# EAGLE board SB v1.1 - panel (EAGLE 6.5.0), part 1 of 2
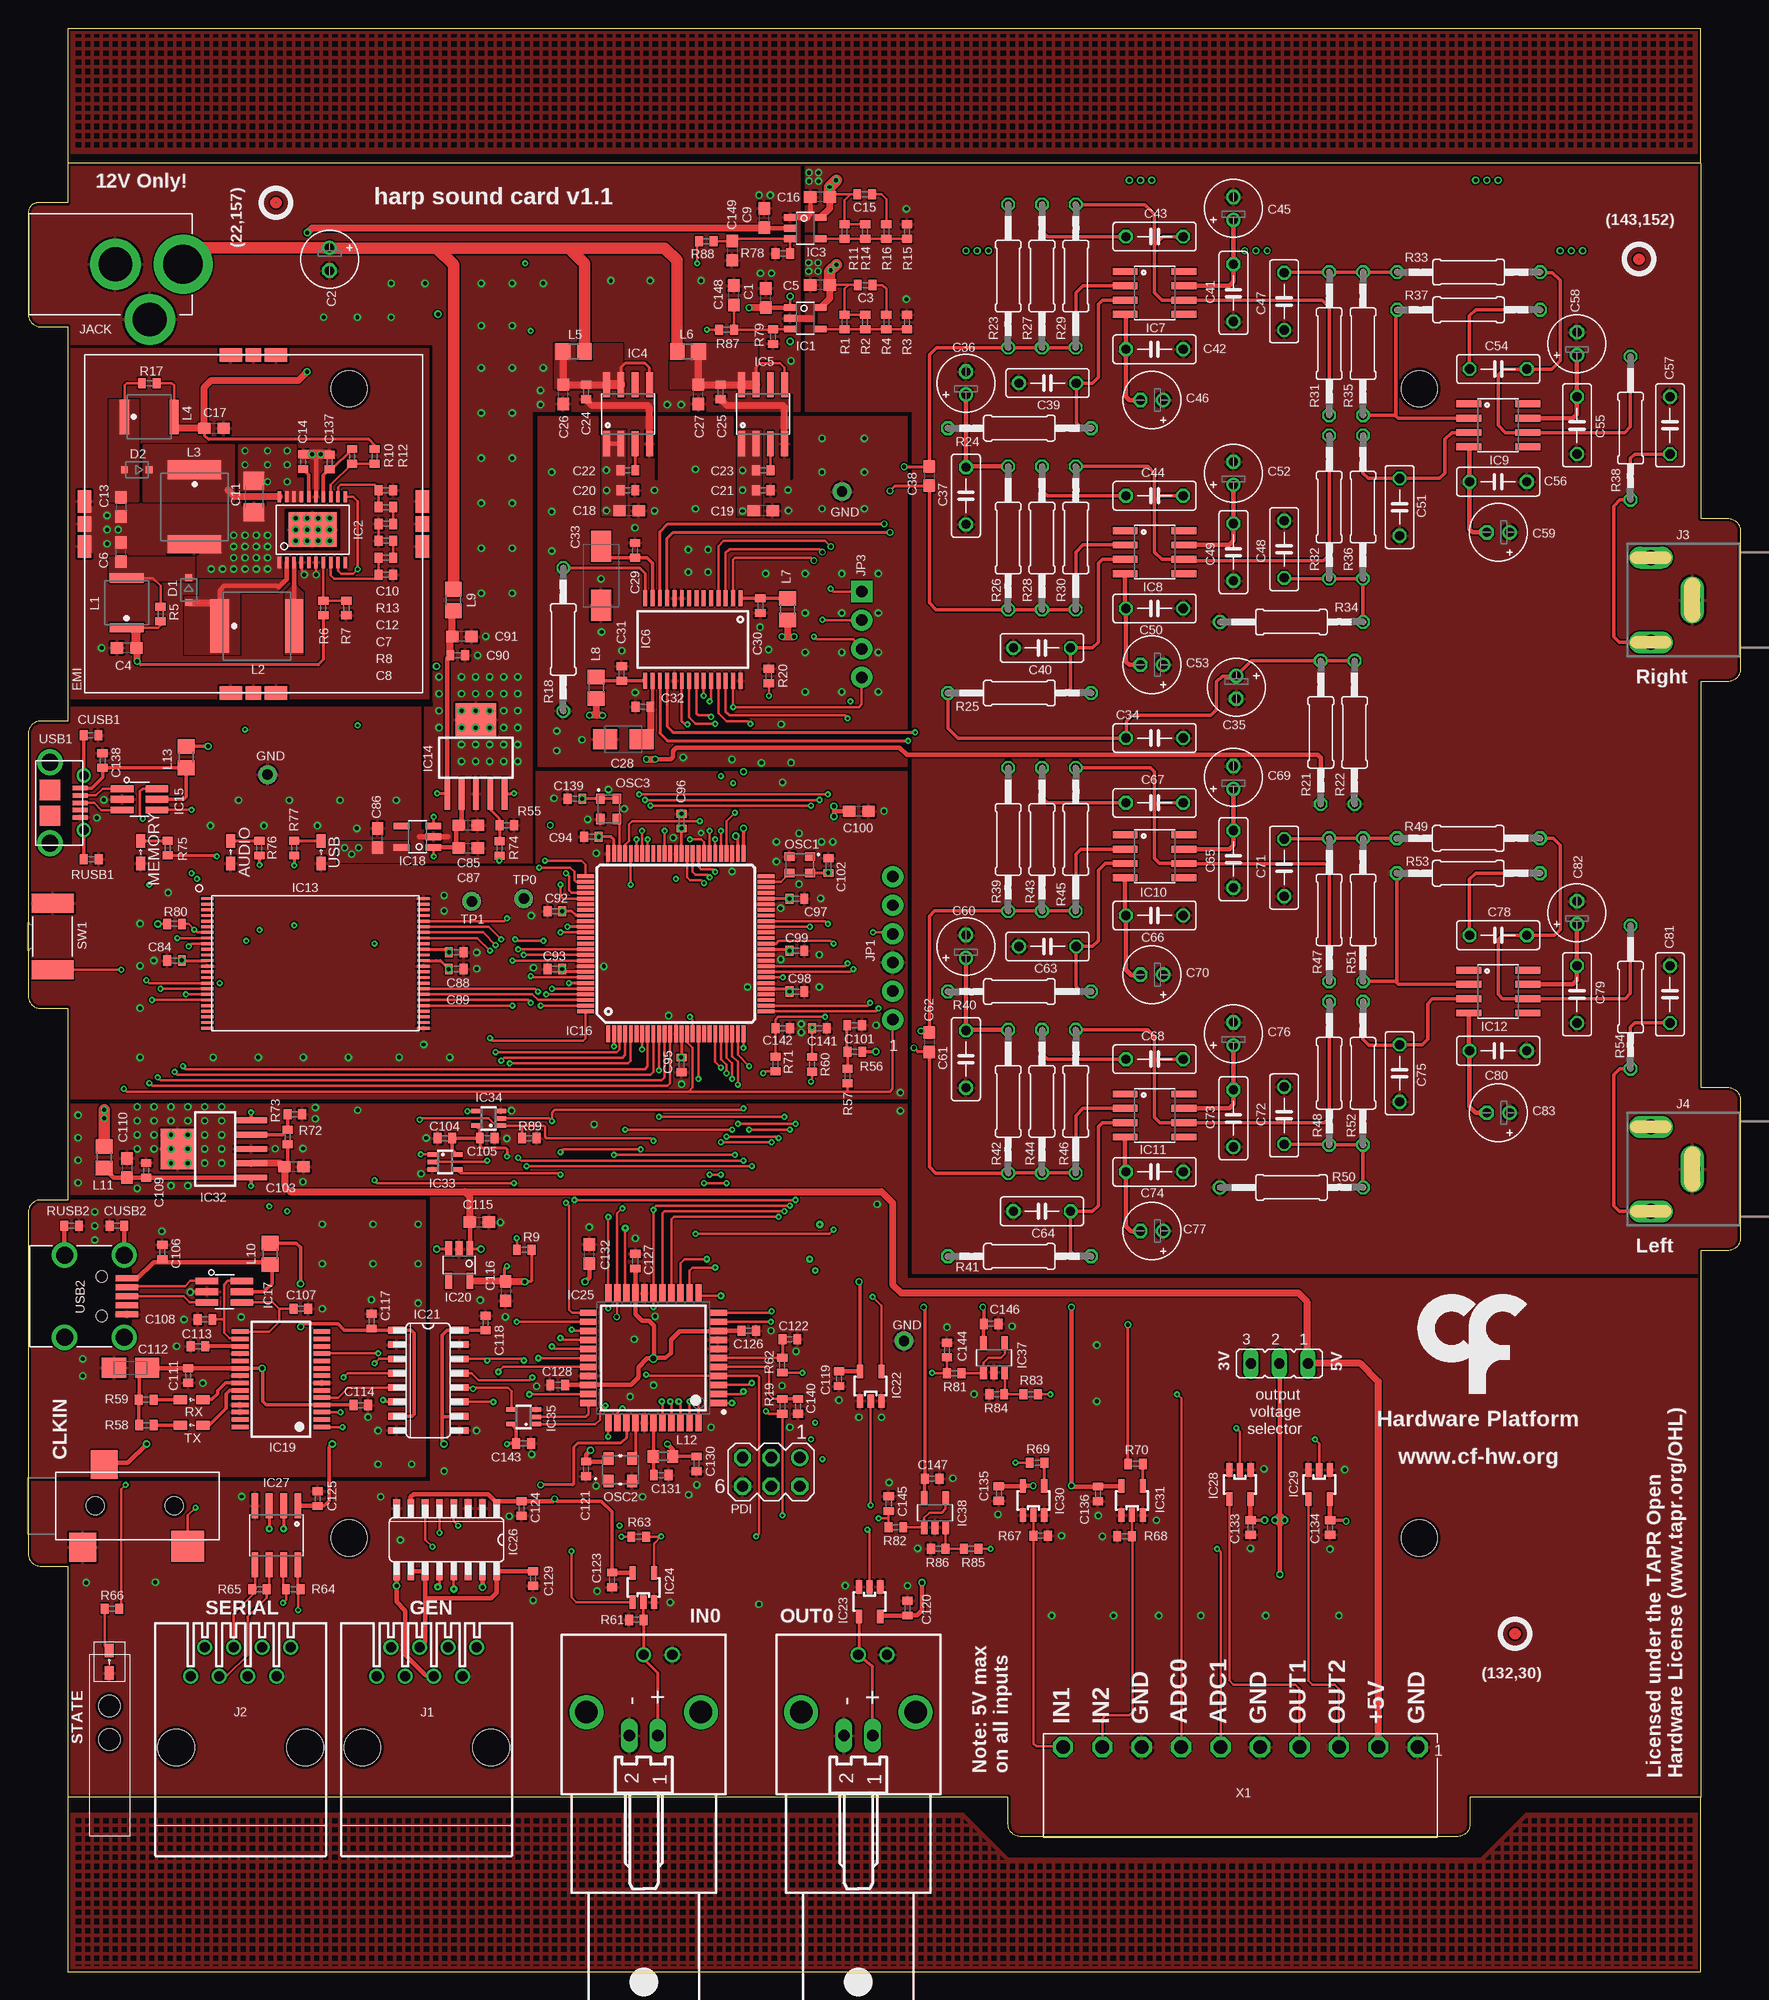
[diagram p0: board, top side]
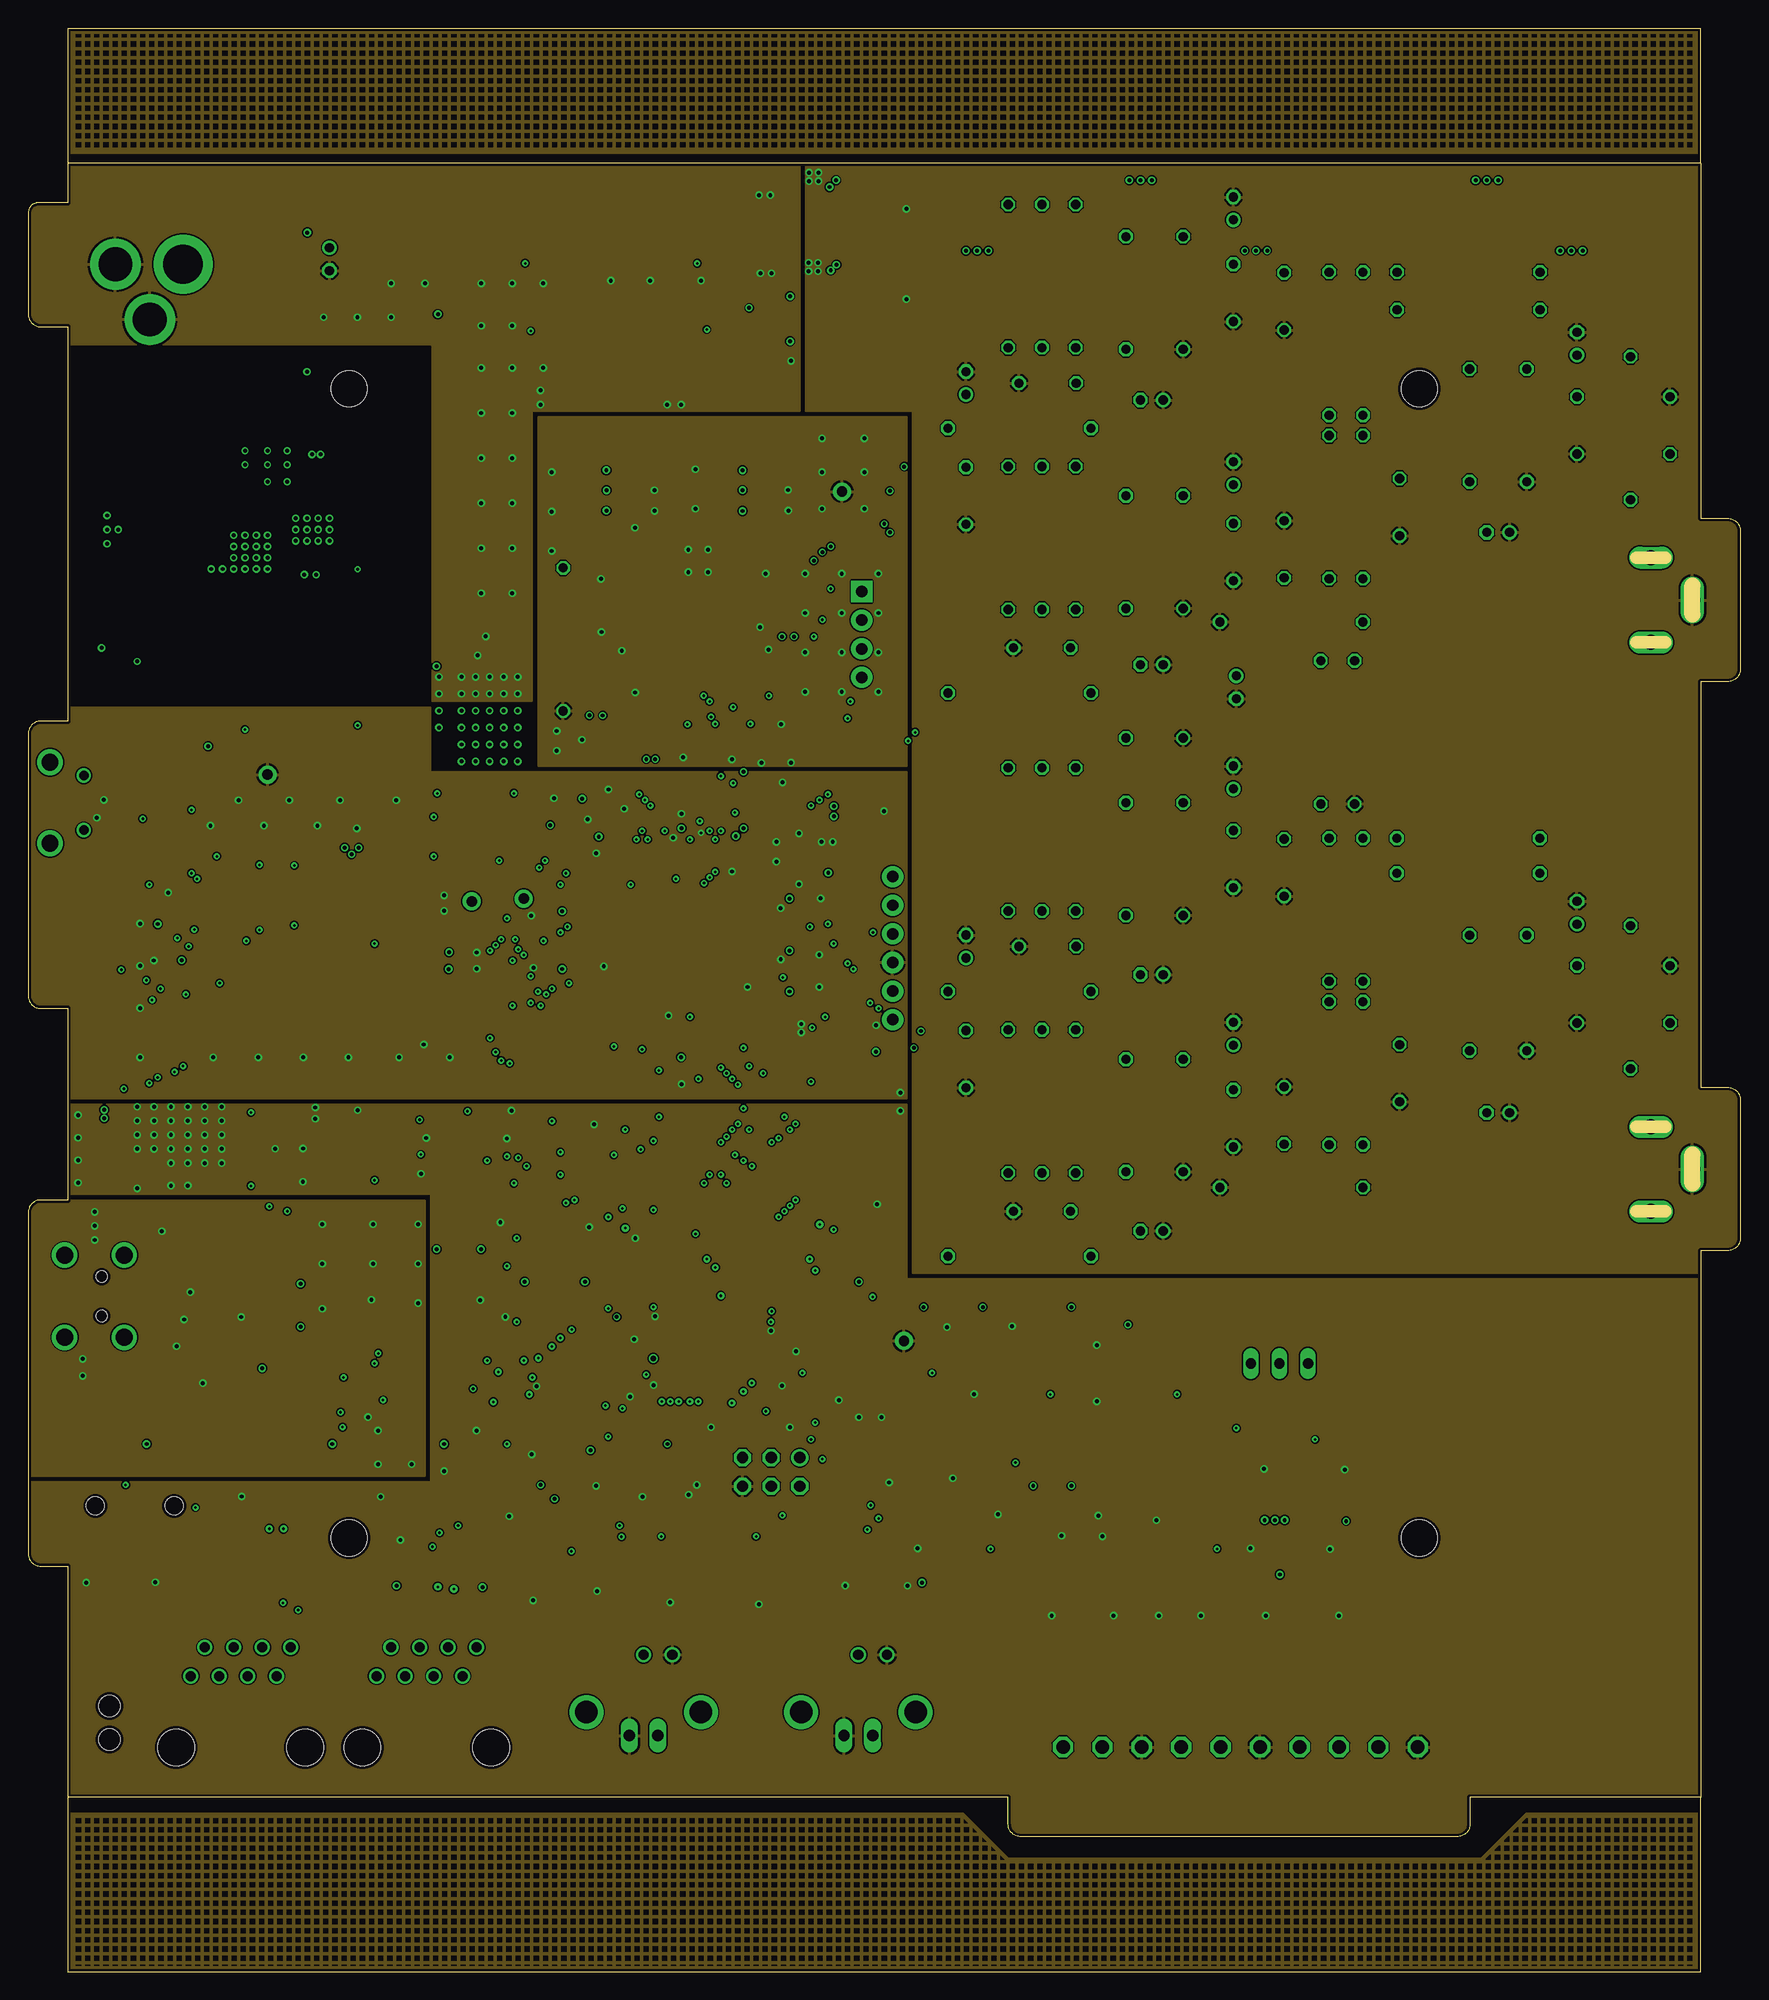
[diagram p1: board, inner layer Route2]
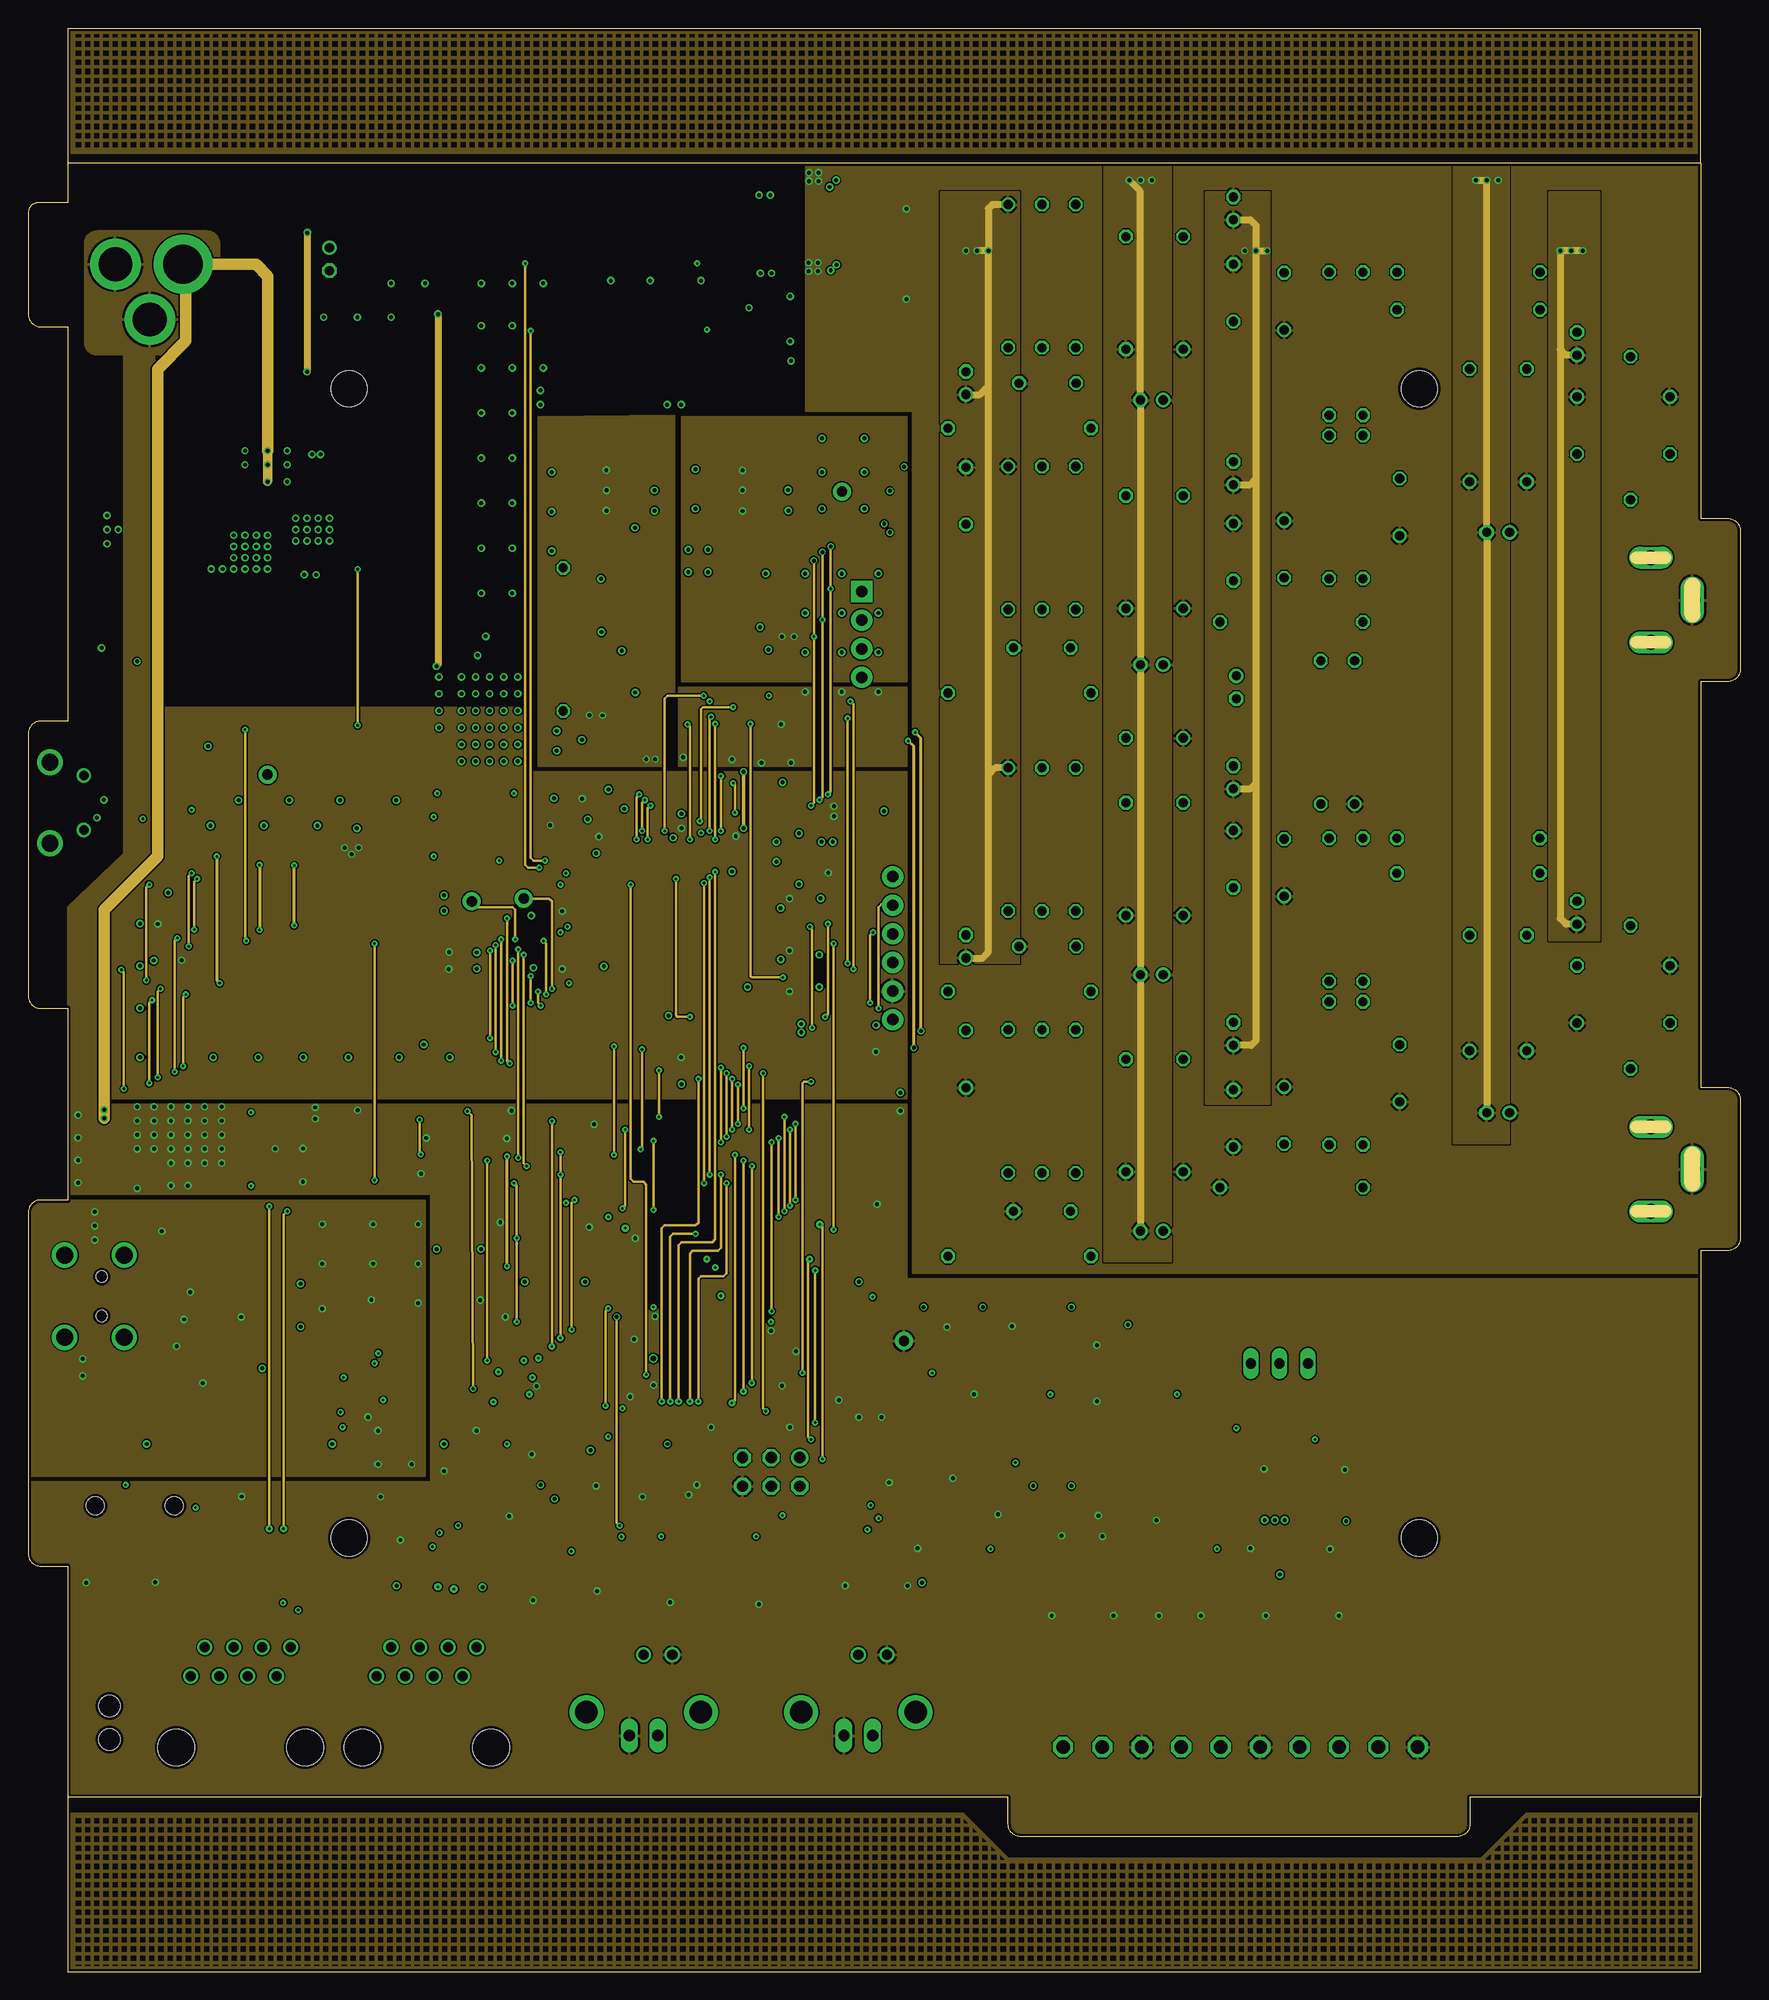
[diagram p2: board, inner layer Route3]
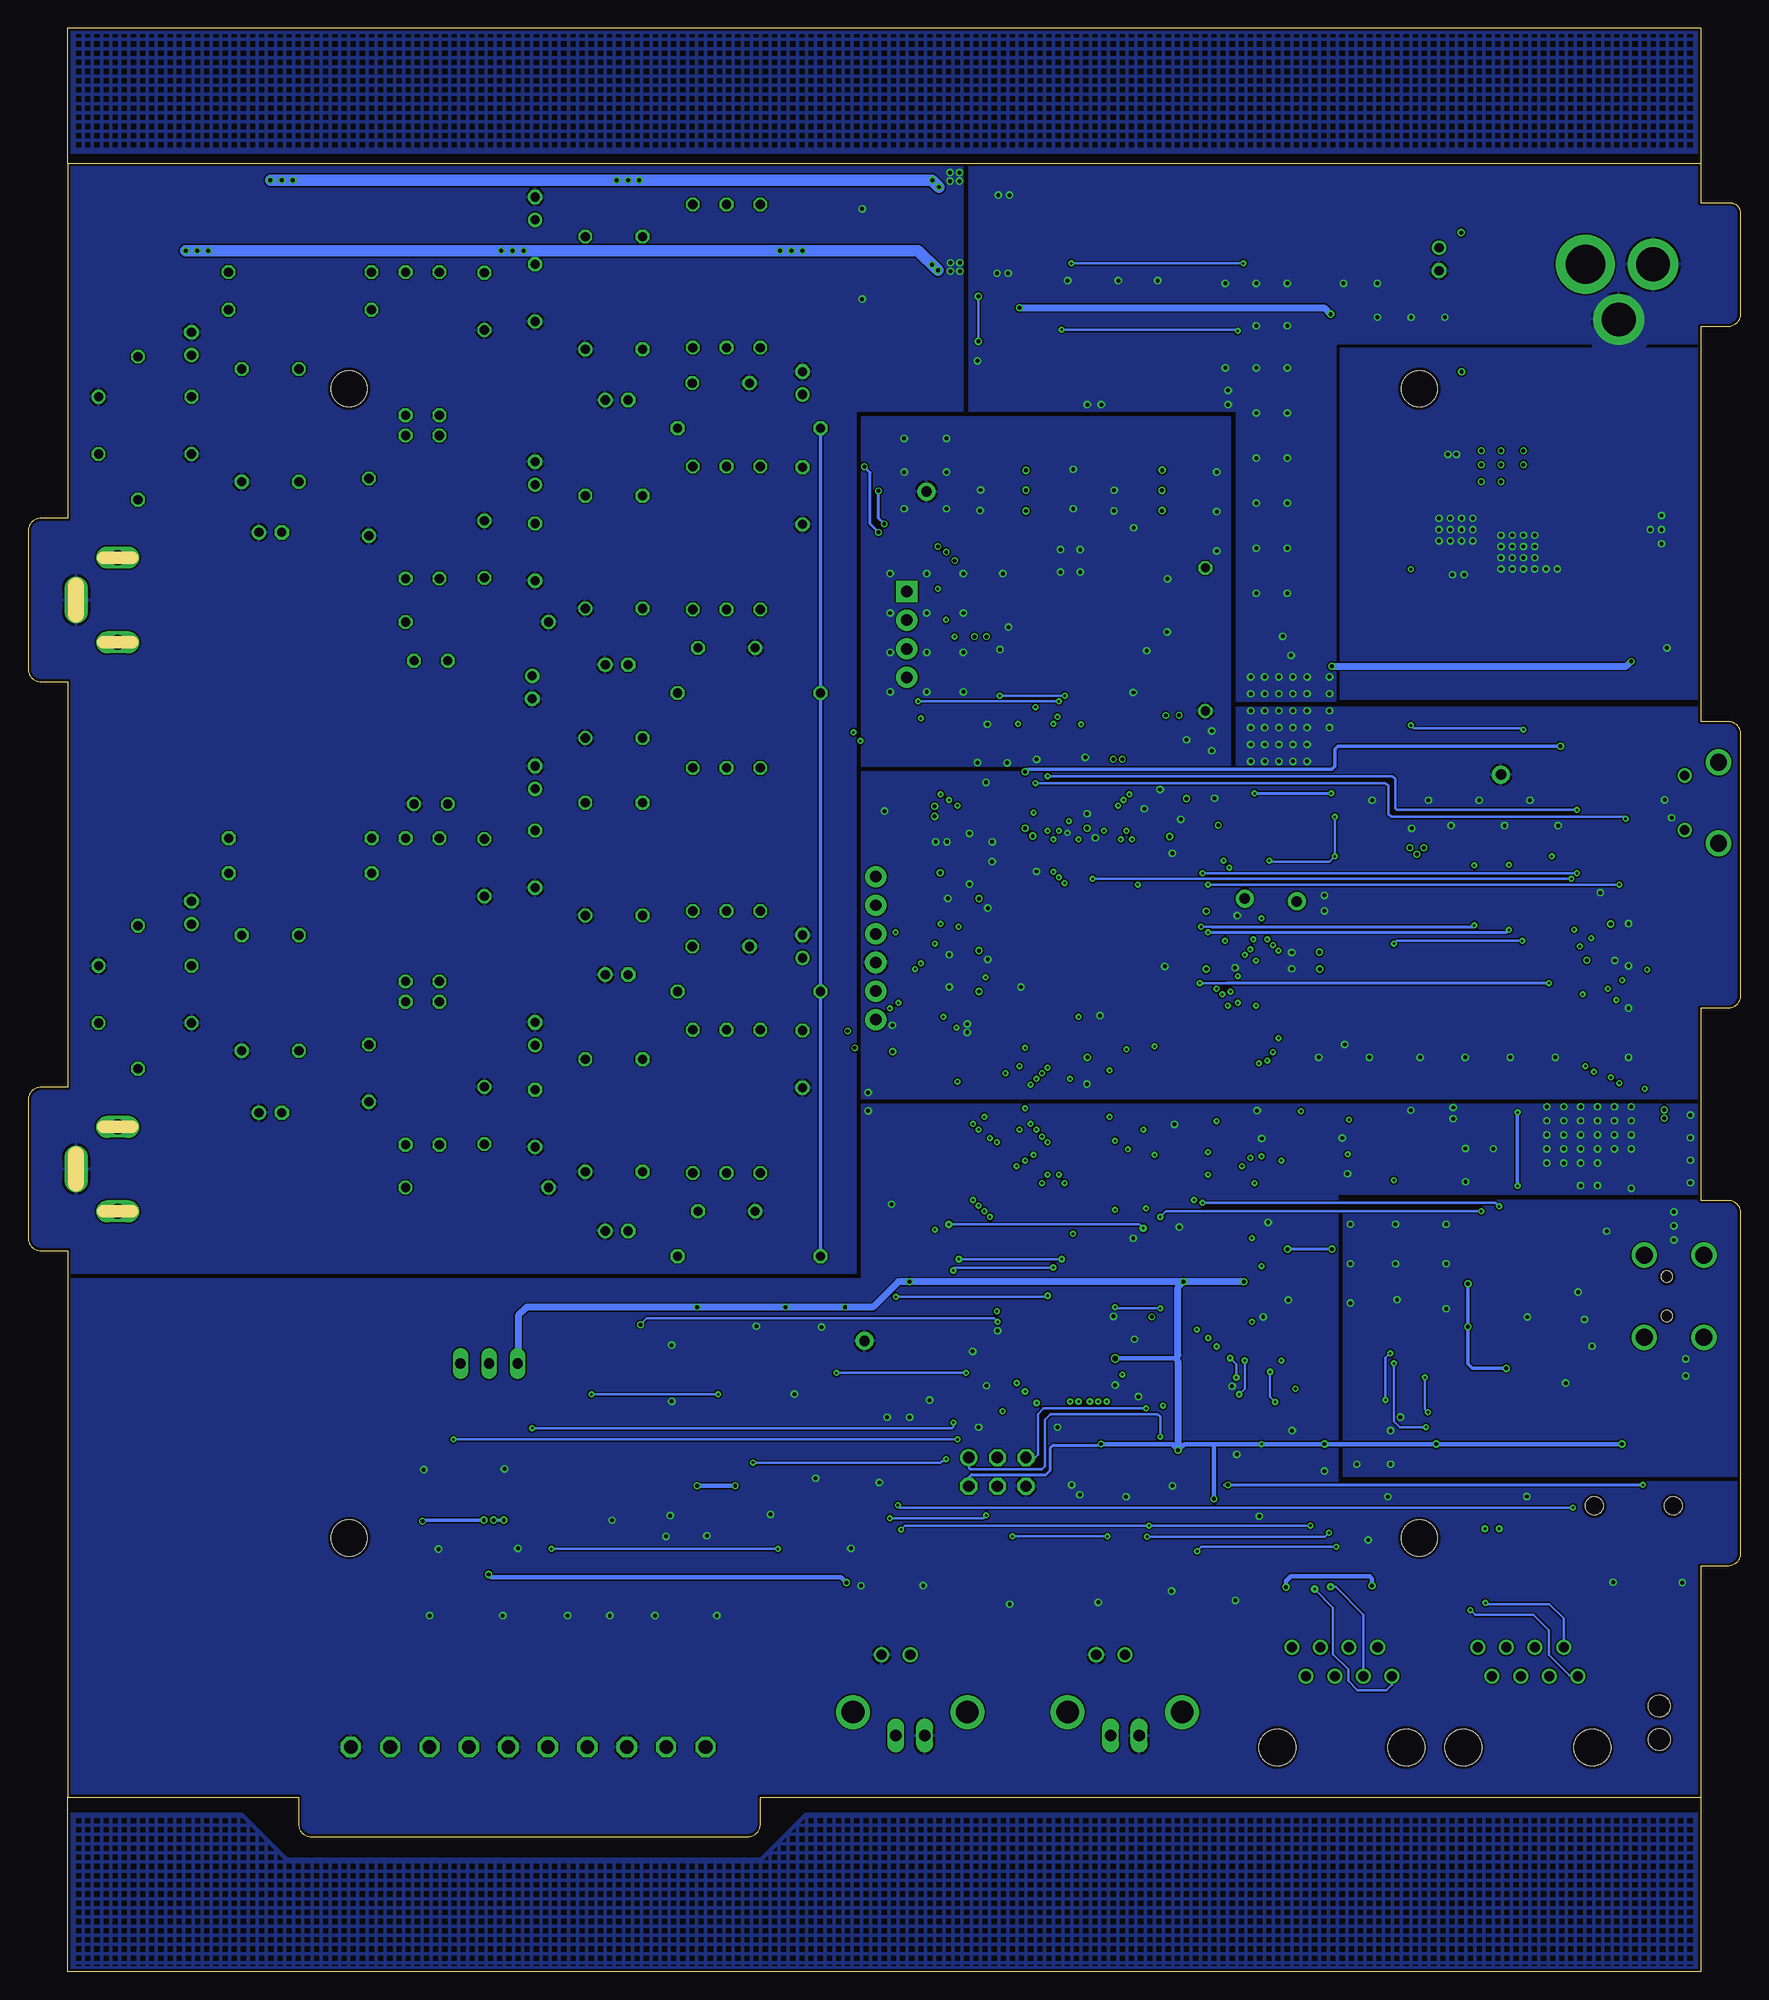
[diagram p3: board, bottom side, seen from below]

Size 152 x 172.5 mm. Coordinates in mm from the lower left corner, seen from the top.
Outline: 3.5,15.5 3.5,36 1.12,36 arc-90 0,37.12 0,67.38 arc-90 1.12,68.5 3.5,68.5 3.5,85.5 1.12,85.5 arc-90 0,86.62 0,109.88 arc-90 1.12,111 3.5,111 3.5,146 1.12,146 arc-90 0,147.12 0,156.1 arc-90 0.9,157 3.5,157 3.5,160.5
Outline: 148.5,160.5 148.5,129 150.88,129 arc-90 152,127.88 152,115.62 arc-90 150.88,114.5 148.5,114.5 148.5,78.5 150.88,78.5 arc-90 152,77.38 152,65.12 arc-90 150.88,64 148.5,64 148.5,15.5
Outline: 148.5,15.5 128,15.5 128,13.12 arc-90 126.88,12 88.12,12 arc-90 87,13.12 87,15.5 3.5,15.5
Outline: 148.5,160.5 3.5,160.5
Outline: 3.5,15.5 3.5,0 148.5,0 148.5,15.5
Outline: 3.5,160.5 3.5,172.5 148.5,172.5 148.5,160.5
Copper layers (1+2*3+16): Top 0.018mm / dielectric 0.36mm / Route2 0.035mm / dielectric 0.71mm / Route3 0.035mm / dielectric 0.36mm / Bottom 0.018mm
Design rules "eC_4Layer_PClass7_BaseCopperO18-I35 *": minimum track width 0.125mm, minimum drill 0.15mm, track to track 0.125mm, track to pad 0.125mm, pad to pad 0.125mm, via to via 0.125mm, smd to smd 0mil, copper to edge 0.25mm, drill to drill 0.35mm, minimum pad ring 0.175mm, minimum via ring 0.125mm, stop-mask expansion 0mil, vias tented up to drill 0.45mm, thermal gap 0.2mm
Holes 3.2 mm at 28.5,38.5 123.5,38.5 28.5,140.5 123.5,140.5
tRestrict: 19 lines
bRestrict: 6 lines

## Footprints (pad centres in the part's own frame; a part is rotated, then mirrored left to right if it is on the bottom)
C0603 = smd 1.1 x 1: 1 -0.85,0; 2 0.85,0
E2-5 = drill 0.813 pad 1.27: + -1.016,0 | drill 0.813 pad 1.27 octagon: - 1.016,0
C0402 = smd 0.7 x 0.9: 1 -0.65,0; 2 0.65,0
C1206 = smd 1.6 x 1.8: 1 -1.4,0; 2 1.4,0
B/3528-21W = smd 2.15 x 1.8: + 1.625,0; - -1.625,0
C/6032-28W = smd 2.75 x 1.8: + 2.625,0; - -2.625,0
C050-025X075 = drill 0.813 octagon: 1 -2.54,0; 2 2.54,0
A/3216-18W = smd 2.15 x 1.8: + 1.475,0; - -1.475,0
35RASMT2BHNTRX = smd 2.4 x 2.55: 1 0.8,3.675; 5 -1.1,-3.675 | smd 2.9 x 2.75: 4 8.2,-3.575 | hole 1.6: 0,0; 7,0
SOD323-R = smd 0.6 x 0.6: A 1.1,0; C -1.1,0
S01-30300500 = smd 1.4 x 1.2: P$1 0,15; P$7 0,-15 | smd 1.2 x 1.4: P$2 -15,0; P$3 15,0 | smd 2 x 1.2: P$4 2,-15; P$5 -2,-15; P$6 2,15; P$8 -2,15 | smd 1.2 x 2: P$9 -15,2; P$10 -15,-2; P$11 15,2; P$12 15,-2
TP_1 = drill 0.925 pad 1.6: TP 0,0
TSOT23-5 = smd 0.6 x 1.05: 1 -0.95,-1.354; 2 0,-1.354; 3 0.95,-1.354; 4 0.95,1.354; 5 -0.95,1.354
TSSOP-EP-20 = smd 0.305 x 0.991: 1 -2.94,-2.918; 2 -2.29,-2.918; 3 -1.64,-2.918; 4 -0.99,-2.918; 5 -0.34,-2.918; 6 0.31,-2.918; 7 0.96,-2.918; 8 1.61,-2.918; 9 2.26,-2.918; 10 2.91,-2.918; 11 2.91,2.918; 12 2.26,2.918; 13 1.61,2.918; 14 0.96,2.918; 15 0.31,2.918; 16 -0.34,2.918; 17 -0.99,2.918; 18 -1.64,2.918; 19 -2.29,2.918; 20 -2.94,2.918 | smd 4.25 x 3.05: EPAD 0,0
SO08 = smd 0.61 x 2.21: 1 -1.905,-2.616; 2 -0.635,-2.616; 3 0.635,-2.616; 4 1.905,-2.616; 5 1.905,2.616; 6 0.635,2.616; 7 -0.635,2.616; 8 -1.905,2.616
SSOP28 = smd 0.348 x 1.397: P1 -4.225,-3.656; P2 -3.575,-3.656; P3 -2.925,-3.656; P4 -2.275,-3.656; P5 -1.625,-3.656; P6 -0.975,-3.656; P7 -0.325,-3.656; P8 0.325,-3.656; P9 0.975,-3.656; P10 1.625,-3.656; P11 2.275,-3.656; P12 2.925,-3.656; P13 3.575,-3.656; P14 4.225,-3.656; P15 4.225,3.656; P16 3.575,3.656; P17 2.925,3.656; P18 2.275,3.656; P19 1.625,3.656; P20 0.975,3.656; P21 0.325,3.656; P22 -0.325,3.656; P23 -0.975,3.656; P24 -1.625,3.656; P25 -2.275,3.656; P26 -2.925,3.656; P27 -3.575,3.656; P28 -4.225,3.656
TSOP-48 = smd 0.25 x 1.1: P1 -5.75,-9.6; P2 -5.25,-9.6; P3 -4.75,-9.6; P4 -4.25,-9.6; P5 -3.75,-9.6; P6 -3.25,-9.6; P7 -2.75,-9.6; P8 -2.25,-9.6; P9 -1.75,-9.6; P10 -1.25,-9.6; P11 -0.75,-9.6; P12 -0.25,-9.6; P13 0.25,-9.6; P14 0.75,-9.6; P15 1.25,-9.6; P16 1.75,-9.6; P17 2.25,-9.6; P18 2.75,-9.6; P19 3.25,-9.6; P20 3.75,-9.6; P21 4.25,-9.6; P22 4.75,-9.6; P23 5.25,-9.6; P24 5.75,-9.6; P25 5.75,9.6; P26 5.25,9.6; P27 4.75,9.6; P28 4.25,9.6; P29 3.75,9.6; P30 3.25,9.6; P31 2.75,9.6; P32 2.25,9.6; P33 1.75,9.6; P34 1.25,9.6; P35 0.75,9.6; P36 0.25,9.6; P37 -0.25,9.6; P38 -0.75,9.6; P39 -1.25,9.6; P40 -1.75,9.6; P41 -2.25,9.6; P42 -2.75,9.6; P43 -3.25,9.6; P44 -3.75,9.6; P45 -4.25,9.6; P46 -4.75,9.6; P47 -5.25,9.6; P48 -5.75,9.6
SOT223-6 = smd 0.508 x 2.87: P$1 -2.54,-3.175; P$2 -1.27,-3.175; P$3 0,-3.175; P$4 1.27,-3.175; P$5 2.54,-3.175 | smd 3.6 x 2.962: P$6 0,3.353
SOT23-6L = smd 0.6 x 2: P$1 -0.95,-1.55; P$2 0,-1.55; P$3 0.95,-1.55; P$4 0.95,1.55; P$5 0,1.55; P$6 -0.95,1.55
TQFP-100 = smd 1.5 x 0.35: 1 -8,6; 2 -8,5.5; 3 -8,5; 4 -8,4.5; 5 -8,4; 6 -8,3.5; 7 -8,3; 8 -8,2.5; 9 -8,2; 10 -8,1.5; 11 -8,1; 12 -8,0.5; 13 -8,0; 14 -8,-0.5; 15 -8,-1; 16 -8,-1.5; 17 -8,-2; 18 -8,-2.5; 19 -8,-3; 20 -8,-3.5; 21 -8,-4; 22 -8,-4.5; 23 -8,-5; 24 -8,-5.5; 25 -8,-6; 51 8,-6; 52 8,-5.5; 53 8,-5; 54 8,-4.5; 55 8,-4; 56 8,-3.5; 57 8,-3; 58 8,-2.5; 59 8,-2; 60 8,-1.5; 61 8,-1; 62 8,-0.5; 63 8,0; 64 8,0.5; 65 8,1; 66 8,1.5; 67 8,2; 68 8,2.5; 69 8,3; 70 8,3.5; 71 8,4; 72 8,4.5; 73 8,5; 74 8,5.5; 75 8,6 | smd 0.35 x 1.5: 26 -6,-8; 27 -5.5,-8; 28 -5,-8; 29 -4.5,-8; 30 -4,-8; 31 -3.5,-8; 32 -3,-8; 33 -2.5,-8; 34 -2,-8; 35 -1.5,-8; 36 -1,-8; 37 -0.5,-8; 38 0,-8; 39 0.5,-8; 40 1,-8; 41 1.5,-8; 42 2,-8; 43 2.5,-8; 44 3,-8; 45 3.5,-8; 46 4,-8; 47 4.5,-8; 48 5,-8; 49 5.5,-8; 50 6,-8; 76 6,8; 77 5.5,8; 78 5,8; 79 4.5,8; 80 4,8; 81 3.5,8; 82 3,8; 83 2.5,8; 84 2,8; 85 1.5,8; 86 1,8; 87 0.5,8; 88 0,8; 89 -0.5,8; 90 -1,8; 91 -1.5,8; 92 -2,8; 93 -2.5,8; 94 -3,8; 95 -3.5,8; 96 -4,8; 97 -4.5,8; 98 -5,8; 99 -5.5,8; 100 -6,8
TSOT23-5' = smd 0.6 x 1.408: 1 -0.95,-1.404; 2 0,-1.404; 3 0.95,-1.404; 4 0.95,1.404; 5 -0.95,1.404
SSOP28' = smd 0.4 x 1.5: 1 -4.225,-3.625; 2 -3.575,-3.625; 3 -2.925,-3.625; 4 -2.275,-3.625; 5 -1.625,-3.625; 6 -0.975,-3.625; 7 -0.325,-3.625; 8 0.325,-3.625; 9 0.975,-3.625; 10 1.625,-3.625; 11 2.275,-3.625; 12 2.925,-3.625; 13 3.575,-3.625; 14 4.225,-3.625; 15 4.225,3.625; 16 3.575,3.625; 17 2.925,3.625; 18 2.275,3.625; 19 1.625,3.625; 20 0.975,3.625; 21 0.325,3.625; 22 -0.325,3.625; 23 -0.975,3.625; 24 -1.625,3.625; 25 -2.275,3.625; 26 -2.925,3.625; 27 -3.575,3.625; 28 -4.225,3.625
NSOIC-16 = smd 0.6 x 1.55: 1 -4.437,-2.789; 2 -3.167,-2.789; 3 -1.897,-2.789; 4 -0.627,-2.789; 5 0.643,-2.789; 6 1.913,-2.789; 7 3.183,-2.789; 8 4.453,-2.789; 9 4.453,2.811; 10 3.183,2.811; 11 1.913,2.811; 12 0.643,2.811; 13 -0.627,2.811; 14 -1.897,2.811; 15 -3.167,2.811; 16 -4.437,2.811
SOT23-5 = smd 0.55 x 1.2: 1 -0.95,-1.3; 2 0,-1.3; 3 0.95,-1.3; 4 0.95,1.3; 5 -0.95,1.3
QFP80P1200X1200X120-44N = smd 1.55 x 0.55: 1 -5.75,4; 2 -5.75,3.2; 3 -5.75,2.4; 4 -5.75,1.6; 5 -5.75,0.8; 6 -5.75,0; 7 -5.75,-0.8; 8 -5.75,-1.6; 9 -5.75,-2.4; 10 -5.75,-3.2; 11 -5.75,-4; 23 5.75,-4; 24 5.75,-3.2; 25 5.75,-2.4; 26 5.75,-1.6; 27 5.75,-0.8; 28 5.75,0; 29 5.75,0.8; 30 5.75,1.6; 31 5.75,2.4; 32 5.75,3.2; 33 5.75,4 | smd 0.55 x 1.55: 12 -4,-5.75; 13 -3.2,-5.75; 14 -2.4,-5.75; 15 -1.6,-5.75; 16 -0.8,-5.75; 17 0,-5.75; 18 0.8,-5.75; 19 1.6,-5.75; 20 2.4,-5.75; 21 3.2,-5.75; 22 4,-5.75; 34 4,5.75; 35 3.2,5.75; 36 2.4,5.75; 37 1.6,5.75; 38 0.8,5.75; 39 0,5.75; 40 -0.8,5.75; 41 -1.6,5.75; 42 -2.4,5.75; 43 -3.2,5.75; 44 -4,5.75
SC-70-5 = smd 0.4 x 0.9: 1 -0.65,-1.1; 2 0,-1.1; 3 0.65,-1.1; 4 0.65,1.1; 5 -0.65,1.1
SOT23-5' = smd 0.6 x 1.2: 1 -0.95,-1.306; 2 0,-1.306; 3 0.95,-1.306; 4 0.95,1.306; 5 -0.95,1.306
BNC_RA = drill 0.9 pad 1.27: 1 0,-5.08; 2 -2.54,-5.08 | drill 2: P$1 -5.08,0; P$2 5.08,0
7395-02 = drill 1.016 long: 1 1.27,0; 2 -1.27,0
520426-4 = drill 0.889: 1 -4.445,6.35; 2 -3.175,8.89; 3 -1.905,6.35; 4 -0.635,8.89; 5 0.635,6.35; 6 1.905,8.89; 7 3.175,6.35; 8 4.445,8.89 | hole 3.251: -5.715,0; 5.715,0
RCA = drill 1.4 long: P1 0,0 | drill 1.3 long: P2 3.7,3.75; P3 3.7,-3.75
DC_POWER_INPUT_2.1MM = drill 3.5: P1 8.5,0 | drill 3: P2 2.5,0; P3 5.55,-4.9
1X06_NO_SILK = drill 1.016 pad 1.88: 1 0,0; 2 2.54,0; 3 5.08,0; 4 7.62,0; 5 10.16,0; 6 12.7,0
JP2 = drill 0.914 long: 1 -2.54,0; 2 0,0; 3 2.54,0
1X04_NO_SILK = drill 1.016 pad 1.88 square: 1 0,0 | drill 1.016 pad 1.88: 2 2.54,0; 3 5.08,0; 4 7.62,0
IND_LPS4012 = smd 0.81 x 3.04: 1 -2.2,0; 2 2.2,0
IND_LPS6225 = smd 1.675 x 4.75: 1 -3.3,0 | smd 1.575 x 4.75: 2 3.3,0
R0805 = smd 1.3 x 1.5: 1 -0.95,0; 2 0.95,0
R0603 = smd 1 x 1.1: 1 -0.85,0; 2 0.85,0
LED_HAND = smd 1.2 x 0.8: A -1,0; K 1,0
CRYSTAL_2.5X2.0MM = smd 0.9 x 0.75: P$1 -0.9,-0.725; P$2 0.9,-0.725; P$3 0.9,0.725; P$4 -0.9,0.725
OSCILLATOR_3.2X2.5 = smd 0.9 x 1.1: P$1 -1.05,-1; P$2 1.05,-1; P$3 1.05,1; P$4 -1.05,1
MA03-2 = drill 1.016: 1 -2.54,-1.27 | drill 1.016 octagon: 2 -2.54,1.27; 3 0,-1.27; 4 0,1.27; 5 2.54,-1.27; 6 2.54,1.27
R0402 = smd 0.7 x 0.9: 1 -0.65,0; 2 0.65,0
0207/12 = drill 0.813 octagon: 1 -6.35,0; 2 6.35,0
SWITCH_KSS = smd 1.7 x 3.7: O -2.95,0; P 2.95,0
LED_PIPE_7513D2-L = hole 1.93: -1.486,0; 1.486,0
ZX62D-B-5P8 = smd 0.4 x 1.35: P$1 -1.3,2.675; P$2 -0.65,2.675; P$3 0,2.675; P$4 0.65,2.675; P$5 1.3,2.675 | smd 1.8 x 1.8: P$6 -1.15,0; P$7 1.15,0 | drill 1.5 pad 2.3: SHIELD_1 -3.6,0; SHIELD_2 3.6,0 | drill 0.85 pad 1.25: SHIELD_3 2.425,3; SHIELD_4 -2.425,3
240-0002-1 = smd 0.5 x 2: P$1 -1.6,8.65; P$2 -0.8,8.65; P$3 0,8.65; P$4 0.8,8.65; P$5 1.6,8.65 | drill 1.5: SHIELD_1 -3.65,3.1; SHIELD_2 3.65,3.1; SHIELD_3 3.65,8.4; SHIELD_4 -3.65,8.4 | hole 1: -1.75,6.4; 1.75,6.4
CON_3.5MM_1X10 = drill 1.2 octagon: P1 -15.75,0; P2 -12.25,0; P3 -8.75,0; P4 -5.25,0; P5 -1.75,0; P6 1.75,0; P7 5.25,0; P8 8.75,0; P9 12.25,0; P10 15.75,0

## Placement (x,y rotation side)
C1  2.2u  [C0603]  65.49,148.55 90 top
C2  68uF  [E2-5]  26.75,152 270 top
C3  1u  [C0402]  74.3,149.7 180 top
C4  1u  [C0603]  8.75,117.5 180 top
C5  2.2u  [C0603]  70.3,149.7 180 top
C6  1u  [C0603]  8.25,126 90 top
C7  820p  [C0402]  31.75,127 180 top
C8  47p  [C0402]  31.75,124 0 top
C9  2.2u  [C0603]  65.34,155.65 90 top
C10  68p  [C0402]  31.75,131.5 0 top
C11  10u  [C1206]  20.05,130.92 270 top
C12  6.8n  [C0402]  31.75,128.5 180 top
C13  1u  [C0603]  8.25,130 270 top
C14  1u  [C0402]  24.41,134.03 90 top
C15  100n  [C0402]  74.25,157.75 180 top
C16  2.2u  [C0603]  70.3,157.51 180 top
C17  1u  [C0603]  16.51,136.99 0 top
C18  10uF  [C0603]  53.35,129.68 180 top
C19  10uF  [C0603]  65.25,129.68 180 top
C20  100nF  [C0402]  53.25,131.5 180 top
C21  100nF  [C0402]  65.25,131.5 180 top
C22  10nF  [C0402]  53.25,133.25 180 top
C23  10nF  [C0402]  65.25,133.25 180 top
C24  100nF  [C0402]  49.52,140.2 90 top
C25  100nF  [C0402]  61.47,140.2 90 top
C26  10uF  [C0603]  47.5,140 90 top
C27  10uF  [C0603]  59.5,140 90 top
C28  10u  [B/3528-21W]  52.84,109.38 0 top
C29  100nF  [C0402]  53.88,126.16 90 top
C30  100nF  [C0402]  65,121.25 270 top
C31  100nF  [C0402]  52.7,115.23 90 top
C32  100nF  [C0402]  54.58,112.28 180 top
C33  47u  [C/6032-28W]  50.86,123.9 90 top
C34  100nF  [C050-025X075]  100,109.5 0 top
C35  47uF  [E2-5]  107.25,114 270 top
C36  4.7uF  [E2-5]  83.25,141 90 top
C37  100nF  [C050-025X075]  83.25,131 270 top
C38  100pF  [C0603]  80,132.75 270 top
C39  100nF  [C050-025X075]  90.5,141 180 top
C40  100nF  [C050-025X075]  90,117.5 180 top
C41  100nF  [C050-025X075]  107,149 270 top
C42  100nF  [C050-025X075]  100,144 180 top
C43  100pF  [C050-025X075]  100,154 0 top
C44  100pF  [C050-025X075]  100,131 0 top
C45  4.7uF  [E2-5]  107,156.5 90 top
C46  4.7uF  [E2-5]  99.75,139.5 180 top
C47  5.6nF  [C050-025X075]  111.5,148.25 270 top
C48  5.6nF  [C050-025X075]  111.5,126.25 90 top
C49  100nF  [C050-025X075]  107,126 270 top
C50  100nF  [C050-025X075]  100,121 180 top
C51  2.7nF  [C050-025X075]  121.75,130 270 top
C52  4.7uF  [E2-5]  107,133 90 top
C53  4.7uF  [E2-5]  99.75,116 180 top
C54  2.7nF  [C050-025X075]  130.5,142.25 0 top
C55  100nF  [C050-025X075]  137.5,137.25 270 top
C56  100nF  [C050-025X075]  130.5,132.25 180 top
C57  3.9nF  [C050-025X075]  145.75,137.25 90 top
C58  4.7uF  [E2-5]  137.5,144.5 90 top
C59  4.7uF  [E2-5]  130.5,127.75 180 top
C60  4.7uF  [E2-5]  83.25,91 90 top
C61  100nF  [C050-025X075]  83.25,81 270 top
C62  100pF  [C0603]  80,82.5 270 top
C63  100nF  [C050-025X075]  90.5,91 180 top
C64  100nF  [C050-025X075]  90,67.5 180 top
C65  100nF  [C050-025X075]  107,98.75 270 top
C66  100nF  [C050-025X075]  100,93.75 180 top
C67  100pF  [C050-025X075]  100,103.75 0 top
C68  100pF  [C050-025X075]  100,81 0 top
C69  4.7uF  [E2-5]  107,106 90 top
C70  4.7uF  [E2-5]  99.75,88.5 180 top
C71  5.6nF  [C050-025X075]  111.5,98 270 top
C72  5.6nF  [C050-025X075]  111.5,76 90 top
C73  100nF  [C050-025X075]  107,75.75 270 top
C74  100nF  [C050-025X075]  100,71 180 top
C75  2.7nF  [C050-025X075]  121.75,79.75 270 top
C76  4.7uF  [E2-5]  107,83.25 90 top
C77  4.7uF  [E2-5]  99.75,65.75 180 top
C78  2.7nF  [C050-025X075]  130.5,92 0 top
C79  100nF  [C050-025X075]  137.5,86.75 270 top
C80  100nF  [C050-025X075]  130.5,81.75 180 top
C81  3.9nF  [C050-025X075]  145.75,86.75 90 top
C82  4.7uF  [E2-5]  137.5,94 90 top
C83  4.7uF  [E2-5]  130.5,76.25 180 top
C84  100nF  [C0402]  13,89.75 180 top
C85  10uF  [C0603]  39.07,101.77 0 top
C86  10uF  [C0603]  31.02,100.63 90 top
C87  10uF  [C0603]  39.08,99.74 0 top
C88  100nF  [C0402]  38,90.5 0 top
C89  100nF  [C0402]  38,89 0 top
C90  100nF  [C0402]  38.13,116.84 180 top
C91  10uF  [C0603]  38.5,118.5 180 top
C92  100nF  [C0402]  46.75,94.12 180 top
C93  100nF  [C0402]  46.75,89 180 top
C94  100nF  [C0402]  50,100.75 180 top
C95  100nF  [C0402]  58,80.5 270 top
C96  100nF  [C0402]  58,102.12 90 top
C97  100nF  [C0402]  68.25,95.25 0 top
C98  100nF  [C0402]  68.25,87 0 top
C99  100nF  [C0402]  68.25,90.62 0 top
C100  10uF  [C0603]  73.75,103 0 top
C101  100nF  [C0402]  73.36,84.01 0 top
C102  100nF  [C0402]  71.05,98.17 90 top
C103  10uF  [C0603]  23.59,71.46 0 top
C104  100nF  [C0402]  37,74 180 top
C105  100nF  [C0402]  40.75,74 0 top
C106  100nF  [C0402]  11.92,63.88 90 top
C107  47pF  [C0402]  24.22,58.84 0 top
C108  47pF  [C0402]  15.71,57.9 180 top
C109  100nF  [C0402]  10.48,71.14 270 top
C110  10uF  [C0603]  8.78,71.35 270 top
C111  100nF  [C0402]  14.21,52.93 270 top
C112  4.7uF  [A/3216-18W]  9.09,53.61 0 top
C113  100nF  [C0402]  15.08,55.51 180 top
C114  100nF  [C0402]  29.53,50.3 0 top
C115  10uF  [C0603]  40.05,66.54 0 top
C116  10uF  [C0603]  42.39,60.41 270 top
C117  100nF  [C0402]  30.5,57.75 90 top
C118  100nF  [C0402]  40.61,57.59 90 top
C119  100nF  [C0402]  71.97,52.64 270 top
C120  100nF  [C0402]  78.07,32.27 90 top
C121  100nF  [C0402]  49.54,44.64 270 top
C122  100nF  [C0402]  67.63,56.14 0 top
C123  100nF  [C0402]  51.85,34.79 270 top
C124  100nF  [C0402]  43.8,41.13 270 top
C125  100nF  [C0402]  25.7,41.99 90 top
C126  100nF  [C0402]  63.97,56.88 0 top
C127  100nF  [C0402]  53.9,63.07 90 top
C128  100nF  [C0402]  47.01,52.08 180 top
C129  100nF  [C0402]  44.83,34.91 270 top
C130  330nF  [C0402]  59.35,45.09 270 top
C131  330nF  [C0402]  56.19,44.09 0 top
C132  10uF  [C0603]  49.82,63.7 90 top
C133  100nF  [C0402]  108.52,39.44 270 top
C134  100nF  [C0402]  115.58,39.44 270 top
C135  100nF  [C0402]  86.16,42.46 270 top
C136  100nF  [C0402]  94.96,42.43 270 top
C137  1u  [C0402]  26.75,134 90 top
C138  100nF  [C0402]  6.6,107.5 90 top
C139  100nF  [C0402]  48.55,104.12 180 top
C140  100nF  [C0402]  68.35,50.19 270 top
C141  100nF  [C0402]  70.25,83.75 0 top
C142  100nF  [C0402]  67,83.75 0 top
C143  100nF  [C0402]  43.98,46.89 0 top
C144  15nF  [C0402]  81.58,55.19 270 top
C145  15nF  [C0402]  76.4,41.55 270 top
C146  100nF  [C0402]  85.5,57.5 0 top
C147  100nF  [C0402]  80.25,43.75 0 top
C148  1u  [C0603]  62.65,148.79 90 top
C149  1u  [C0603]  62.5,152.75 270 top
CLKIN  [35RASMT2BHNTRX]  5.96,41.36 0 top
CUSB1  4.7nF  [C0402]  5.59,109.74 0 top
CUSB2  4.7nF  [C0402]  7.88,66.22 180 top
D1  [SOD323-R]  14.25,122.62 270 top
D2  [SOD323-R]  9.65,133.31 180 top
EMI  S01-30300500  [S01-30300500]  20,128.5 90 top
GND  TP  [TP_1]  72.25,131.38 0 top
GND174  TP  [TP_1]  77.75,56 0 top
GND176  TP  [TP_1]  21.25,106.25 0 top
IC1  ADP7118  [TSOT23-5]  69,146.75 270 top
IC2  ADP5070EP  [TSSOP-EP-20]  25.25,128 0 top
IC3  ADP7182  [TSOT23-5]  69,154.75 270 top
IC4  ADP3303  [SO08]  53.25,138.25 0 top
IC5  ADP3303  [SO08]  65.25,138.25 0 top
IC6  AD1955  [SSOP28]  59,118.25 180 top
IC7  AD797  [SO08]  100,149 270 top
IC8  AD797  [SO08]  100,126 270 top
IC9  AD797  [SO08]  130.5,137.25 270 top
IC10  AD797  [SO08]  100,99 270 top
IC11  AD797  [SO08]  100,76 270 top
IC12  AD797  [SO08]  130.5,87 270 top
IC13  S34ML  [TSOP-48]  25.5,89.5 270 top
IC14  TPS73801  [SOT223-6]  39.75,107.75 0 top
IC15  USBLC6-2SC6  [SOT23-6L]  9.9,104.06 270 top
IC16  PIC32MZ2048EFM100  [TQFP-100]  57.5,91.25 90 top
IC17  USBLC6-2SC6  [SOT23-6L]  17.44,60.36 270 top
IC18  LP5907MFX-3.3  [TSOT23-5']  34.58,100.73 90 top
IC19  FT232RL  [SSOP28']  22.45,52.59 90 top
IC20  LP5907MFX-3.3  [TSOT23-5']  38.27,62.74 180 top
IC21  SI8642BC-B-IS1  [NSOIC-16]  35.5,52.5 270 top
IC22  SN74LVC1G125  [SOT23-5]  74.79,51.98 0 top
IC23  SN74LVC1G125  [SOT23-5]  74.7,32.86 180 top
IC24  SN74LVC1G125  [SOT23-5]  54.62,34.11 0 top
IC25  ATXMEGAxxxA4U-AU  [QFP80P1200X1200X120-44N]  55.5,54.48 180 top
IC26  SI8645  [NSOIC-16]  37.16,38.36 180 top
IC27  SN65HVD  [SO08]  22.04,38.74 180 top
IC28  M74VHC1GT50DTT1G  [SOT23-5]  107.58,43.25 180 top
IC29  M74VHC1GT50DTT1G  [SOT23-5]  114.61,43.25 180 top
IC30  SN74LVC1G125  [SOT23-5]  89.25,41.83 0 top
IC31  SN74LVC1G125  [SOT23-5]  98,41.83 0 top
IC32  TPS73801  [SOT223-6]  16.61,73.03 90 top
IC33  VHC1GT126  [SC-70-5]  37,71.88 270 top
IC34  VHC1GT126  [SC-70-5]  40.88,75.75 90 top
IC35  VHC1GT125  [SC-70-5]  44,49.25 90 top
IC37  OPA365  [SOT23-5']  85.75,54.5 0 top
IC38  OPA365  [SOT23-5']  80.5,40.75 0 top
IN  BNC  [BNC_RA]  54.65,23.05 180 top
IN1  [7395-02]  54.65,20.96 0 top
J1  Port 1  [520426-4]  35.38,19.9 0 top
J2  Port 1  [520426-4]  18.87,19.9 0 top
J3  RCARCA  [RCA]  147.75,121.75 180 top
J4  RCARCA  [RCA]  147.75,71.25 180 top
JACK  DC_JACK2.1MM  [DC_POWER_INPUT_2.1MM]  5.25,151.55 0 top
JP1  [1X06_NO_SILK]  76.75,84.5 90 top
JP2  [JP2]  111.08,53.98 180 top
JP3  NA  [1X04_NO_SILK]  74,122.5 270 top
L1  1.5u  [IND_LPS4012]  8.75,121.5 90 top
L2  [IND_LPS6225]  20.32,119.42 0 top
L3  [IND_LPS6225]  14.75,130 270 top
L4  1.5u  [IND_LPS4012]  10.75,138 0 top
L5  600@100M  [R0805]  48.43,143.81 180 top
L6  600@100M  [R0805]  58.57,143.81 0 top
L7  600@100M  [R0805]  67.41,120.93 90 top
L8  600@100M  [R0805]  50.43,113.97 90 top
L9  600@100M  [R0805]  37.75,121.75 270 top
L10  ???  [R0805]  21.48,63.72 270 top
L11  600@100M  [R0805]  6.75,72.3 270 top
L12  1u  [R0603]  56.36,45.74 0 top
L13  ???  [R0805]  14.03,107.81 270 top
LED1  RED  [LED_HAND]  10,99.38 270 top
LED2  RED  [LED_HAND]  18,99.38 270 top
LED3  RED  [LED_HAND]  26,99.38 270 top
OSC1  OSCILLATOR2.5X2.0MM  [CRYSTAL_2.5X2.0MM]  68.5,98.25 180 top
OSC2  [OSCILLATOR_3.2X2.5]  52.57,44.56 0 top
OSC3  XOSC_2.5X2.0MM  [CRYSTAL_2.5X2.0MM]  51.54,103.21 270 top
OUT  BNC  [BNC_RA]  73.69,23.05 180 top
OUT1  [7395-02]  73.69,20.96 0 top
PDI  [MA03-2]  65.96,44.37 180 top
R1  180k  [R0402]  72.48,146.42 270 top
R2  180k  [R0402]  74.31,146.42 270 top
R3  10k  [R0402]  78.03,146.42 90 top
R4  10k  [R0402]  76.18,146.42 90 top
R5  6.04  [R0402]  11.75,120.5 270 top
R6  63.4k  [R0402]  26.21,121.05 270 top
R7  3.57k  [R0402]  28.25,121.04 270 top
R8  8.45k  [R0402]  31.75,125.5 0 top
R9  100k  [R0402]  44.04,64.08 0 top
R10  2.8k  [R0402]  28.75,134.5 270 top
R11  150k  [R0402]  72.48,154.45 270 top
R12  54.9k  [R0402]  30.75,134.5 270 top
R13  5.76k  [R0402]  31.75,130 180 top
R14  215k  [R0402]  74.31,154.45 270 top
R15  10k  [R0402]  78.03,154.45 90 top
R16  10k  [R0402]  76.18,154.45 90 top
R17  5.36  [R0402]  10.75,141 180 top
R18  2.49k  [0207/12]  47.5,118.25 90 top
R19  3.16k  [R0402]  66.95,50.19 90 top
R20  100k  [R0402]  65.75,115 90 top
R21  2.21k  [0207/12]  114.75,110 270 top
R22  2.80k  [0207/12]  117.75,110 90 top
R23  2k  [0207/12]  87,150.5 90 top
R24  806  [0207/12]  88,137 180 top
R25  806  [0207/12]  88,113.5 180 top
R26  2k  [0207/12]  87,127.25 90 top
R27  100  [0207/12]  90,150.5 90 top
R28  100  [0207/12]  90,127.25 90 top
R29  2.0k  [0207/12]  93,150.5 90 top
R30  2.0k  [0207/12]  93,127.25 90 top
R31  681  [0207/12]  115.5,144.5 90 top
R32  681  [0207/12]  115.5,130 270 top
R33  226  [0207/12]  127.87,150.85 0 top
R34  226  [0207/12]  112.15,119.8 0 top
R35  324  [0207/12]  118.5,144.5 270 top
R36  324  [0207/12]  118.5,130 90 top
R37  100  [0207/12]  127.87,147.5 0 top
R38  332  [0207/12]  142.25,137 270 top
R39  2k  [0207/12]  87,100.5 90 top
R40  806  [0207/12]  88,87 180 top
R41  806  [0207/12]  88,63.5 180 top
R42  2k  [0207/12]  87,77.25 90 top
R43  100  [0207/12]  90,100.5 90 top
R44  100  [0207/12]  90,77.25 90 top
R45  2.0k  [0207/12]  93,100.5 90 top
R46  2.0k  [0207/12]  93,77.25 90 top
R47  681  [0207/12]  115.5,94.25 90 top
R48  681  [0207/12]  115.5,79.75 270 top
R49  226  [0207/12]  127.85,100.6 0 top
R50  226  [0207/12]  112.15,69.61 0 top
R51  324  [0207/12]  118.5,94.25 270 top
R52  324  [0207/12]  118.5,79.75 90 top
R53  100  [0207/12]  127.85,97.5 0 top
R54  332  [0207/12]  142.25,86.5 270 top
R55  3.16k  [R0402]  42.5,101.75 180 top
R56  10k  [R0402]  73.39,81.67 0 top
R57  1k  [R0402]  72.75,79.5 90 top
R58  2050 NA  [R0402]  10.5,48.53 180 top
R59  680 NA  [R0402]  10.48,50.77 180 top
R60  3.16k  [R0402]  69.59,80.54 90 top
R61  100k  [R0402]  53.98,31.23 180 top
R62  3.16k  [R0402]  66.94,53.84 90 top
R63  1k  [R0402]  54.2,38.61 180 top
R64  100 NA  [R0402]  23.54,33.94 0 top
R65  100 NA  [R0402]  20.53,33.94 0 top
R66  68  [R0402]  7.44,32.22 0 top
R67  100k  [R0402]  89.88,38.7 0 top
R68  100k  [R0402]  97.33,38.67 180 top
R69  33  [R0402]  89.56,45.19 180 top
R70  33  [R0402]  98.3,45.08 180 top
R71  3.16k  [R0402]  66.35,80.58 90 top
R72  3.16k  [R0402]  23.68,76.11 180 top
R73  9.76k  [R0402]  23.04,74.09 270 top
R74  9.76k  [R0402]  41.85,99.7 270 top
R75  2050  [R0402]  12.38,99.75 270 top
R76  2050  [R0402]  20.53,99.72 270 top
R77  2050  [R0402]  23.62,99.73 270 top
R78  100k  [R0402]  67,152.5 180 top
R79  100k  [R0402]  66.14,145.12 270 top
R80  3.16k  [R0402]  13,93 180 top
R81  10k  [R0402]  82.22,53.13 180 top
R82  10k  [R0402]  77.04,39.45 180 top
R83  24k  [R0402]  89,51.25 0 top
R84  16k  [R0402]  86,51.25 0 top
R85  24k  [R0402]  83.73,37.53 0 top
R86  16k  [R0402]  80.8,37.53 0 top
R87  100k  [R0402]  62,145.75 0 top
R88  100k  [R0402]  60.21,153.6 0 top
R89  100k  [R0402]  44.5,74 0 top
RUSB1  1M  [R0402]  5.6,98.75 0 top
RUSB2  1M  [R0402]  3.87,66.2 0 top
RX  GREEN NA  [LED_HAND]  14.53,50.77 0 top
STATE  GREEN  [LED_HAND]  7.21,27.51 270 top
SW1  SW1"  [SWITCH_KSS]  2.17,91.88 90 top
TP0  TP  [TP_1]  44,95.25 0 top
TP1  TP  [TP_1]  39.38,95 0 top
TX  RED NA  [LED_HAND]  14.53,48.53 0 top
U$1  [LED_PIPE_7513D2-L]  7.21,22.11 90 top
U$2  [FIDUCIAL]  132,30 0 top
U$3  [FIDUCIAL]  143,152 0 top
U$4  [FIDUCIAL]  22,157 0 top
U$9  [LOGO_6]  126.52,57.05 0 top
USB1  USB_MICRO_B  [ZX62D-B-5P8]  1.94,103.75 270 top
USB2  [240-0002-1]  0.13,59.96 270 top
X1  CON_3.5MM_1X10  [CON_3.5MM_1X10]  107.61,19.95 180 top

## Library data of the parts
C1 C3-C33 C38 C62 C84-C149 CUSB1 CUSB2 L5-L13 R1-R17 R19 R20 R55-R89 RUSB1 RUSB2 = rcl
C2 C35 C36 C45 C46 C52 C53 C58-C60 C69 C70 C76 C77 C82 C83 R18 R21-R54 = resistor
C34 C37 C39-C44 C47-C51 C54-C57 C61 C63-C68 C71-C75 C78-C81 = adafruit
CLKIN IN J3 J4 OUT USB1 USB2 X1 = CNP-connectors
D1 D2 = diode
EMI GND GND174 GND176 JACK L1-L4 LED1-LED3 OSC1-OSC3 RX STATE SW1 TP0 TP1 TX U$1 U$9 = CNP-miscellaneous
IC1 IC3 IC21 IC26 IC37 IC38 = CNP-ics 2
IC2 IC4-IC14 IC16 IC27 IC32-IC35 = CNP-ics 1
IC15 IC17 = CNP 2
IC18 IC20 = CNP
IC19 = ftdichip; MPN: FT232RL; OC_FARNELL: 1146032; OC_NEWARK: 91K9918
IC22-IC24 IC28-IC31 = My_library 0v2
IC25 = xmega-a4
IN1 OUT1 = con-molex; OC_FARNELL: 9731601; OC_NEWARK: unknown
J1 J2 = con-amp
JP1 JP3 = SparkFun-Connectors
JP2 = jumper
PDI = con-lstb; OC_FARNELL: unknown; OC_NEWARK: unknown
U$2-U$4 = fiducial

## Nets
!MCLR: IC16.15 JP1.1 R57.1 SW1.O
!SS1: IC6.P25 IC16.32
!UART_RX: IC27.7 J2.2 R64.1
!UART_TX: IC27.6 J2.3 R65.2
+5V: C103.1 C115.1 IC20.1 IC20.3 IC32.P$2 JP2.1 R73.2 X1.P2
+12V: C3.2 C5.1 C36.+ C37.1 C41.1 C45.+ C49.1 C52.+ C55.1 C58.+ C60.+ C61.1 C65.1 C69.+ C73.1 C76.+ C79.1 C82.+ IC1.5 IC7.7 IC8.7 IC9.7 IC10.7 IC11.7 IC12.7 R1.1 R2.1 R23.2 R26.2 R39.2 R42.2
+15V: C1.1 C4.1 IC1.1 L1.1 R5.2 R6.2
-12V: C15.2 C16.1 C42.2 C46.- C50.2 C53.- C56.2 C59.- C66.2 C70.- C74.2 C77.- C80.2 C83.- IC3.5 IC7.4 IC8.4 IC9.4 IC10.4 IC11.4 IC12.4 R11.1 R14.1
-15V: C9.1 C17.1 IC3.2 L4.2 R12.1 R17.1
A5V0: C18.2 C20.2 C22.2 IC4.1 IC4.2 L8.1 R21.2
A+3V3: C131.1 IC25.39 L12.1
ADC0: C144.2 R60.1 R62.1 R81.2
ADC0_EZ: C141.1 IC16.41 R60.2
ADC0_IN: R83.2 X1.P7
ADC1: C145.2 R19.1 R71.1 R82.2
ADC1_EZ: C142.1 IC16.42 R71.2
ADC1_IN: R85.2 X1.P6
ALE: IC13.P17 IC16.11
AUDIO: IC16.86 R76.2
BUSY: IC13.P7 IC16.16 R80.1
CE: IC13.P9 IC16.79
CLE: IC13.P16 IC16.80
CLK_IN: CLKIN.4 IC22.2
CLK_SYNC: IC22.4 IC25.12
CTS: IC21.11 IC25.29
D5V: C85.1 C87.1 IC14.P$2 IC18.1 IC18.3 R74.2
D5V0: C19.2 C21.2 C23.2 IC5.1 IC5.2 L7.1
D+: IC15.P$4 IC16.55
D-: IC15.P$6 IC16.54
DAC_!RST: IC6.P23 IC16.65 R20.1
EN_DCDC: IC2.9 IC2.11 IC25.24 R9.1
EN_IN0: IC24.1 IC26.6
EN_N12V: IC16.77 R88.1
EN_P12V: IC16.76 R87.1
FILTB: C28.+ C32.1 IC6.P16
FT_CTS: IC19.11 IC21.6
FT_RTS: IC19.3 IC21.4
FT_RXD: IC19.5 IC21.5
FT_TXD: IC19.1 IC21.3
GND: C1.2 C2.- C4.2 C5.2 C6.2 C7.2 C8.2 C9.2 C10.2 C11.2 C12.2 C13.2 C14.2 C16.2 C17.2 C18.1 C19.1 C20.1 C21.1 C24.1 C25.1 C26.1 C27.1 C28.- C29.2 C30.2 C31.2 C32.2 C33.- C34.2 C35.- C36.- C37.2 C39.2 C40.2 C41.2 C42.1 C45.- C46.+ C47.2 C48.2 C49.2 C50.1 C51.2 C52.- C53.+ C55.2 C56.1 C57.2 C58.- C59.+ C60.- C61.2 C63.2 C64.2 C65.2 C66.1 C69.- C70.+ C71.2 C72.2 C73.2 C74.1 C75.2 C76.- C77.+ C79.2 C80.1 C81.2 C82.- C83.+ C84.2 C85.2 C86.2 C87.2 C88.2 C89.2 C90.1 C91.1 C92.2 C93.2 C94.2 C95.2 C96.2 C97.2 C98.2 C99.2 C100.2 C101.2 C102.2 C103.2 C104.2 C105.2 C109.1 C110.1 C115.2 C116.2 C118.2 C119.2 C120.2 C121.2 C122.2 C123.2 C124.2 C125.2 C126.2 C127.2 C128.2 C129.2 C130.2 C131.2 C132.2 C133.2 C134.2 C135.2 C136.2 C137.2 C138.2 C139.2 C140.2 C141.2 C142.2 C143.2 C144.1 C145.1 C146.2 C147.2 C148.2 C149.2 CLKIN.5 CUSB1.2 EMI.P$1 EMI.P$2 EMI.P$3 EMI.P$4 EMI.P$5 EMI.P$6 EMI.P$7 EMI.P$8 EMI.P$9 EMI.P$10 EMI.P$11 EMI.P$12 GND174.TP GND176.TP GND.TP IC1.2 IC2.1 IC2.4 IC2.6 IC2.15 IC2.EPAD IC3.1 IC4.4 IC5.4 IC6.P9 IC6.P10 IC6.P19 IC6.P28 IC13.P13 IC13.P25 IC13.P36 IC13.P48 IC14.P$3 IC14.P$6 IC15.P$2 IC16.13 IC16.31 IC16.36 IC16.45 IC16.53 IC16.63 IC16.75 IC16.84 IC16.92 IC18.2 IC20.2 IC21.9 IC21.15 IC22.1 IC22.3 IC23.1 IC23.3 IC24.3 IC25.7 IC25.8 IC25.18 IC25.30 IC25.38 IC26.2 IC26.3 IC26.8 IC27.4 IC28.1 IC28.3 IC29.1 IC29.3 IC30.1 IC30.3 IC31.1 IC31.3 IC32.P$3 IC32.P$6 IC33.3 IC34.3 IC35.3 IC37.2 IC38.2 IN1.2 IN.2 J3.P1 J4.P1 JACK.P2 JACK.P3 JP1.3 L3.2 LED1.K LED2.K LED3.K OSC1.P$2 OSC2.P$2 OSC3.P$2 OUT1.2 OUT.2 PDI.6 R3.2 R7.2 R15.2 R18.1 R20.2 R22.1 R34.1 R50.1 R55.1 R61.2 R67.2 R68.2 R72.1 R78.2 R79.2 R84.1 R86.1 R89.2 RUSB1.2 STATE.K SW1.P USB1.P$5 X1.P1 X1.P5 X1.P8
GND2: C106.2 C107.2 C108.2 C111.2 C112.- C113.2 C114.2 C117.2 CUSB2.2 IC17.P$2 IC19.7 IC19.18 IC19.21 IC19.25 IC19.26 IC21.2 IC21.8 RUSB2.2 USB2.P$5
GNDIO: IC26.9 IC26.15 J1.5
IN00/TRIG: IC16.71 IC24.4 IC25.4 R63.1
IN1: IC30.2 R67.1 X1.P10
IN01: IC25.20 R69.2
IN02: IC25.10 R70.2
IN2: IC31.2 R68.1 X1.P9
IN_RJ: IC26.13 J1.1
INBK: IC2.3 L2.2
IOUTL+: C62.1 IC6.P18 IC10.2 R39.1 R43.1 R45.1
IOUTL-: C62.2 IC6.P17 IC11.2 R42.1 R44.1 R46.1
IOUTR+: C38.1 IC6.P11 IC7.2 R23.1 R27.1 R29.1
IOUTR-: C38.2 IC6.P12 IC8.2 R26.1 R28.1 R30.1
MEMORY: IC16.95 R75.2
MUTE: IC6.P22 IC16.57
N$1: IC24.2 IN1.1 IN.1 R61.1
N$2: IC26.5 R63.2
N$3: IC14.P$4 R55.2 R74.1
N$4: IC2.7 R6.1 R7.1
N$5: C90.2 C91.2 IC14.P$1 IC14.P$5 L9.2
N$6: IC38.1 IC38.4 R82.1
N$7: C7.1 R8.2
N$8: IC30.4 R69.1
N$9: C8.1 IC2.8 R8.1
N$10: IC31.4 R70.1
N$11: C10.1 IC2.12 R13.2
N$12: C12.1 R13.1
N$13: C14.1 IC2.16
N$14: C3.1 R4.2
N$15: IC16.73 OSC3.P$3
N$18: IC2.13 R10.2 R12.2
N$19: IC37.1 IC37.4 R81.1
N$20: C140.1 IC25.5 R19.2
N$21: C109.2 C110.2 IC32.P$1 IC32.P$5 L11.2
N$22: C137.1 IC2.14 R10.1
N$23: R66.1 STATE.A
N$24: IC32.P$4 R72.2 R73.1
N$25: C122.1 IC25.6 R62.2
N$26: IC1.4 R1.2 R2.2 R3.1 R4.1
N$27: C30.1 IC6.P1 L7.2
N$28: IC3.4 R11.2 R14.2 R15.1 R16.1
N$29: C15.1 R16.2
N$30: C39.1 IC7.3 R24.1
N$31: C29.1 C33.+ IC6.P13
N$32: C31.1 IC6.P15 L8.2
N$33: C23.1 IC5.3
N$34: C40.1 IC8.3 R25.1
N$35: IC6.P14 R18.2
N$36: LED1.A R75.1
N$37: C25.2 C27.2 IC5.5 IC5.7 IC5.8 L6.2
N$38: C113.1 IC19.17
N$39: C106.1 IC17.P$5 L10.2 USB2.P$1
N$40: IC17.P$1 USB2.P$2
N$41: C22.1 IC4.3
N$42: C54.1 R37.2
N$43: C24.2 C26.2 IC4.5 IC4.7 IC4.8 L5.2
N$44: IC37.3 R83.1 R84.2
N$45: C44.2 IC8.6 R30.2 R32.1
N$46: C43.2 IC7.6 R29.2 R31.1
N$47: R59.1 RX.A
N$48: IC19.23 TX.K
N$49: IC19.22 RX.K
N$50: IC17.P$3 USB2.P$3
N$51: LED2.A R76.1
N$52: C47.1 R31.2 R33.1 R35.1
N$53: C48.1 R32.2 R34.2 R36.1
N$54: IC9.2 R35.2 R37.1
N$55: C51.1 IC9.3 R36.2
N$56: C54.2 IC9.6 R33.2 R38.1
N$57: IC38.3 R85.1 R86.2
N$58: C43.1 R27.2
N$59: CUSB2.1 USB2.SHIELD_4
N$60: C44.1 R28.2
N$61: RUSB2.1 USB2.SHIELD_1
N$62: R58.1 TX.A
N$63: C63.1 IC10.3 R40.1
N$64: LED3.A R77.1
N$65: IC16.49 OSC1.P$3
N$66: IC15.P$1 USB1.P$2
N$67: C67.2 IC10.6 R45.2 R47.1
N$68: IC15.P$3 USB1.P$3
N$69: C68.2 IC11.6 R46.2 R48.1
N$70: C71.1 R47.2 R49.1 R51.1
N$71: C72.1 R48.2 R50.2 R52.1
N$72: IC12.2 R51.2 R53.1
N$73: C75.1 IC12.3 R52.2
N$74: C78.2 IC12.6 R49.2 R54.1
N$75: C67.1 R43.2
N$76: C68.1 R44.2
N$77: CUSB1.1 USB1.SHIELD_4
N$78: RUSB1.1 USB1.SHIELD_3
N$79: C148.1 IC1.3 R79.1 R87.2
N$80: C64.1 IC11.3 R41.1
N$81: C78.1 R53.2
N$82: C101.1 R56.1 R57.2
N$83: C149.1 IC3.3 R78.1 R88.2
OSC1: IC25.37 OSC2.P$3
OUT00/SYNC: IC16.22 IC23.2 IC25.21 IC26.4
OUT01: IC25.13 IC28.2
OUT1: IC28.4 X1.P4
OUT02: IC25.14 IC29.2
OUT2: IC29.4 X1.P3
OUT_BNC: IC23.4 OUT1.1 OUT.1
OUT_RJ: IC26.12 J1.3
OUT_SW1: D1.A IC2.2 L2.1
OUT_SW2: D2.C IC2.20 L3.1
OUTL: C57.1 J3.P2 R38.2
OUTN15: C13.1 D2.A L4.1 R17.2
OUTP15: C6.1 D1.C L1.2 R5.1
OUTR: C81.1 J4.P2 R54.2
PAR0: IC16.17 IC25.40
PAR1: IC16.38 IC25.41
PAR2: IC16.59 IC25.42
PAR3: IC16.60 IC25.43
PAR4: IC16.61 IC25.44
PAR5: IC16.2 IC25.1
PAR6: IC16.89 IC25.2
PAR7: IC16.90 IC25.3
PDI-CLK: IC25.35 PDI.5
PDI-DATA: IC25.34 PDI.1
PGEC2: IC16.26 JP1.5
PGED2: IC16.27 JP1.4
PMD0: IC13.P29 IC16.91
PMD1: IC13.P30 IC16.94
PMD2: IC13.P31 IC16.98
PMD3: IC13.P32 IC16.99
PMD4: IC13.P41 IC16.100
PMD5: IC13.P42 IC16.3
PMD6: IC13.P43 IC16.4
PMD7: IC13.P44 IC16.5
PMD8: IC13.P26
PMD9: IC13.P27
PMD10: IC13.P28
PMD11: IC13.P33
PMD12: IC13.P40
PMD13: IC13.P45
PMD14: IC13.P46
PMD15: IC13.P47
RE: IC13.P8 IC16.9
REFCLK/MCLK: IC6.P27 IC16.72 JP3.4
RTS: IC21.13 IC25.28
RXD: IC21.12 IC34.4 IC35.4
RXD_: IC25.33 IC35.2
SCK1: IC6.P26 IC16.34
SCK/BIT_CLK: IC6.P3 IC16.69 JP3.2
SDO1: IC6.P24 IC16.33
SDO/SD: IC6.P4 IC16.70 JP3.1
SS/WORD_CLK: IC6.P2 IC16.68 JP3.3
STATE: IC25.36 R66.2
TP0: IC16.96 TP0.TP
TP1: IC16.97 TP1.TP
TXD: IC21.14 IC25.32 IC33.2
UART1_RX: IC25.23 IC27.3
UART1_TX: IC25.22 IC27.2
UART2_RX: IC16.7 IC25.26 IC33.4
UART2_TX: IC16.25 IC25.27 IC34.2
UART_RX: IC27.8 J2.1 R64.2
UART_TX: IC27.5 J2.4 R65.1
UC_IO0: IC16.20 IC25.11
UC_IO1: IC16.21 IC25.15
UC_IO2: IC16.10 IC25.16
UC_IO3: IC16.24 IC25.17 IC33.1 IC34.1 IC35.1 R89.1
UC_IO4: IC16.23 IC25.25
USB: IC16.85 R77.2
USB5V: C111.1 C112.+ C114.1 C117.1 IC19.4 IC19.20 IC21.1 IC21.7 L10.1 R58.2 R59.2
USBDM: C108.1 IC17.P$6 IC19.16
USBDP: C107.1 IC17.P$4 IC19.15
V+: C2.+ C11.1 IC2.17 IC2.18 IC2.19 JACK.P1 L5.1 L6.1 L9.1 L11.1
VBUS: IC16.51 L13.1
VBUSX: C138.1 IC15.P$5 L13.2 USB1.P$1
VCC: C84.1 C86.1 C88.1 C89.1 C92.1 C93.1 C94.1 C95.1 C96.1 C97.1 C98.1 C99.1 C100.1 C102.1 C139.1 IC13.P12 IC13.P37 IC13.P39 IC16.14 IC16.30 IC16.37 IC16.46 IC16.52 IC16.62 IC16.74 IC16.83 IC16.93 IC18.5 JP1.2 OSC1.P$4 OSC3.P$1 OSC3.P$4 R56.2 R80.2
VCCINT: C120.1 C133.1 C134.1 IC23.5 IC28.5 IC29.5 JP2.2
VCCIO: C104.1 C105.1 C116.1 C118.1 C119.1 C121.1 C123.1 C124.1 C125.1 C126.1 C127.1 C128.1 C130.1 C132.1 C135.1 C136.1 C143.1 C146.1 C147.1 CLKIN.1 IC20.5 IC21.10 IC21.16 IC22.5 IC24.5 IC25.9 IC25.19 IC25.31 IC26.1 IC26.7 IC27.1 IC30.5 IC31.5 IC33.5 IC34.5 IC35.5 IC37.5 IC38.5 JP2.3 L12.2 OSC2.P$4 PDI.2 R9.2
VDD: C129.1 IC26.10 IC26.11 IC26.16 J1.4
VREF: C34.1 C35.+ R21.1 R22.2 R24.2 R25.2 R40.2 R41.2
WE: IC13.P18 IC16.8
WP: IC13.P19 IC16.12
ZEROL: IC6.P21 IC16.56
ZEROR: IC6.P20 IC16.58

## Tracks (layer width: path | path; a pad name or v marks a point on that pad's centre or on a via)
!MCLR  (via drill 0.23 pad 0.53)
  Top 0.203: IC16.15 58.5,82.5 59,82 59,78.5 58.62,78.12 | 58.62,78.12 72.75,78.12 | 72.75,78.12 76.5,78.12 76.75,78.38 JP1.1 | 72.75,78.12 R57.1 | 58.62,78.12 8.75,78.12 v8.5,78.38 | v8.27,88.94 2.19,88.94 SW1.O
  Route3 0.203: v8.5,78.38 8.5,88.71 v8.27,88.94
!SS1  (via drill 0.23 pad 0.53)
  Top 0.203: IC6.P25 61.27,111.71 61.99,111 63.87,111 v64.12,110.75 | v67,88.25 IC16.32
  Route3 0.203: v64.12,110.75 64.12,88.38 64.25,88.25 v67,88.25
!UART_RX  (via drill 0.23 pad 0.53)
  Top 0.203: v22.63,32.74 22.89,33.01 R64.1 22.63,34.2 22.63,35.44
  Top 0.305: 22.63,35.44 IC27.7
  Bottom 0.203: J2.2 15.69,31.37 16.95,32.62 22.5,32.62
  Bottom 0.305: 22.5,32.62 v22.63,32.74
!UART_TX
  Top 0.203: J2.3 16.99,26.31 17.67,26.31 19.48,28.11 19.48,31.5 21.18,33.21 R65.2 | IC27.6 21.41,34.16
  Top 0.305: 21.41,34.16 R65.2
+5V  (via drill 0.35 pad 0.65)
  Top 0.254: IC20.3 v36.27,64.15 v36.26,64.14 | v40.2,64.14 IC20.1
  Top 0.305: IC20.1 | 22.66,71.58 22.74,71.66 C103.1 23.04,71.77 R73.2
  Top 0.406: IC20.1 39.22,66.53 C115.1 39.21,66.55
  Top 0.508: 39.2,64.16 IC20.1
  Top 0.61: X1.P2 119.86,52.38 118.25,54 113.64,54 JP2.1 113.5,54.1 113.5,59.5 112.75,60.25 77.5,60.25 76.75,61 76.75,68.25 75.75,69.25 38.75,69.25 | 38.75,69.25 23.25,69.25 22.82,69.68 22.82,71.26 22.66,71.58 | 39.21,66.55 39.21,68.79 38.75,69.25 | IC32.P$2 22.44,71.76 C103.1
  Bottom 0.254: v36.26,64.14 v40.2,64.14
+12V  (via drill 0.35 pad 0.6, 0.35 pad 0.65)
  Top 0.203: R2.1 R1.1 72.48,149.35 72.88,149.75 | C5.1 71.1,149.75 72.88,149.75 | C3.2 73.6,149.75 72.88,149.75
  Top 0.406: IC9.7 137.13,137.88 137.5,138.25 C55.1 137.48,139.81 137.48,143.47 C58.+ | IC7.7 106.64,149.63 107,150 C41.1 C45.+ | IC8.7 106.64,126.64 107,127 C49.1 C52.+ | IC10.7 106.64,99.64 107,100 C65.1 C69.+ | IC11.7 106.64,76.64 107,77 C73.1 C76.+ | IC12.7 137.13,87.64 137.5,88 C79.1 C82.+ | R42.2 83.31,83.6 C61.1 C60.+ | R26.2 83.31,133.6 C37.1 C36.+
  Top 0.61: 71.15,150.9 v71.25,151 | C5.1 71.15,148.49 IC1.5
  Top 1.016: v71.25,151 v71.75,151.5 | C5.1 71.15,150.9
  Route3 0.61: v109,152.75 109,132.5 | 109,132.5 109,105.5 | 109,105.5 109,82.65 108.58,82.23 C76.+ | C69.+ 108.48,104.98 109,105.5 | C52.+ 108.48,131.98 109,132.5 | 136,144 v136,152.75 v137,152.75 v138,152.75 | 136,144 136,93.5 136.5,93 137.48,93 C82.+ | C58.+ 136.52,143.48 136,144 | 85.25,106.25 85.25,90.5 84.67,89.92 83.31,89.92 C60.+ | 85.25,106.25 85.25,140.75 | 85.25,140.75 v85.25,152.75 | C36.+ 84.48,139.98 85.25,140.75 | R23.2 85.6,156.85 85.25,156.5 v85.25,152.75 | R39.2 85.85,106.85 85.25,106.25 | v109,152.75 v110,152.75 | C45.+ 108.52,155.48 109,155 v109,152.75 | v85.25,152.75 v84.25,152.75
  Bottom 0.61: v85.25,152.75 v84.25,152.75 v83.25,152.75 | v138,152.75 v136,152.75 | v109,152.75 v108,152.75
  Bottom 1.016: v138,152.75 v110,152.75 v108,152.75 v85.25,152.75 v83.25,152.75 73,152.75 v71.25,151
  pour Route3: 81,89.5 88,89.5 88,158 81,158
  pour Route3: 104.5,77 110.25,77 110.25,158 104.5,158
  pour Route3: 135,91.5 139.5,91.5 139.5,158 135,158
+15V  (via drill 0.35 pad 0.6, 0.35 pad 0.65)
  Top 0.203: L1.1 9.25,119.3 11.55,119.3 11.75,119.5 R5.2 | 67.65,144.9 v67.65,144.7 | 67.5,147.85 IC1.1 v67.65,148.7
  Top 0.254: R6.2 26.21,116.46 25.75,116 9.98,116 v9.68,116.3 9.6,116.38 9.6,117 C4.1
  Top 0.406: IC1.1 C1.1
  Top 0.61: C1.1 64.02,147.7 v64,147.68 | v9.68,116.3 9.68,117.42 C4.1
  Top 0.813: C4.1 9.6,118.95 9.25,119.3
  Route3 0.61: v36.38,147.12 36.38,116 v36.25,115.88
  Bottom 0.203: v67.65,144.7 v67.65,148.7
  Bottom 0.61: v64,147.68 36.93,147.68 v36.38,147.12 | v36.25,115.88 10.1,115.88 v9.68,116.3
-12V  (via drill 0.35 pad 0.65)
  Top 0.203: C15.2 73,157.75 | C16.1 71.15,157.75 73,157.75 | R14.1 R11.1 72.48,157.23 73,157.75
  Top 0.254: v71.73,159.01 71.75,159
  Top 0.406: IC7.4 97.46,147.02 C42.2 97.46,139.79 97.75,139.5 C46.- | IC8.4 97.38,121.08 C50.2 97.46,116.29 97.75,116 C53.- | IC9.4 127.96,135.27 C56.2 127.96,128.04 128.25,127.75 C59.- | IC12.4 127.88,81.83 C80.2 127.96,76.79 128.5,76.25 C83.- | IC11.4 97.38,71.08 C74.2 97.46,66.16 97.91,65.71 98.7,65.71 C77.- | IC10.4 97.38,93.83 C66.2 97.46,88.92 97.94,88.45 98.93,88.45 C70.-
  Top 0.61: C16.1 71.15,156.49 IC3.5
  Top 1.016: 71.15,157.75 v71.15,158.4 71.75,159
  Route3 0.61: C77.- C70.- C53.- C46.- 98.73,158.02 v97.75,159 | C83.- C59.- 129.48,158.02 v129.5,159 v128.5,159
  Bottom 0.203: 129.48,159 v129.5,159 | 130.48,159 v130.5,159 | v98.75,159 v99.75,159
  Bottom 0.61: 99.73,159.02 v98.75,159
  Bottom 1.016: v71.15,158.4 71.75,159 v97.75,159 v98.75,159 v128.5,159 129.48,159 | 130.48,159 v129.5,159
  pour Route3: 95.5,63 101.5,63 101.5,160.5 95.5,160.5
  pour Route3: 126.5,73.5 131.5,73.5 131.5,160.5 126.5,160.5
-15V  (via drill 0.35 pad 0.65)
  Top 0.203: R17.1 12.75,141 12.95,140.8 L4.2 12.95,137.3 13.25,137
  Top 0.254: R12.1 30.75,135.5 30.25,136 16.01,136 15.66,136.35 C17.1
  Top 0.406: C9.1 65.39,154.75 IC3.2
  Top 0.61: v24.75,142 24,141.25 16.25,141.25 15.65,140.65 15.65,137 13.25,137 | v24.79,154.36 25.17,154.75 65.29,154.75 C9.1
  Top 0.813: 15.65,137 C17.1
  Route3 0.61: v24.79,154.36 24.79,142.03 v24.75,142
A5V0  (via drill 0.35 pad 0.6, 0.35 pad 0.65)
  Top 0.406: IC4.2 IC4.1 | R21.2 114.75,107.75 114.5,108 78,108 77.38,108.62 57.5,108.62 57.25,108.38 57.25,107.85 57.01,107.61 v55.67,107.61 v55.67,107.62 | 55.38,107.62 v54.88,107.62
  Top 0.61: v51,111.5 50.5,111.5 | 50.5,111.5 v49.84,111.5 v49.83,111.51 | L8.1 50.43,111.57 50.5,111.5 | v54.88,107.62 v55.67,107.62
  other vias: 51.33,133.28 51.36,131.48 51.33,129.68
  pour Top (no thermals): 53,136.75 53,129.25 51,129.25 51,136.75
  pour Route3: 45.25,138 57.38,138.12 57.38,107 45.25,107
A+3V3
  Top 0.305: IC25.39 L12.1 55.54,45.71 C131.1
ADC0  (via drill 0.23 pad 0.53)
  Top 0.203: v68.72,53.15 66.98,53.15 | R60.1 69.59,79.09 v69.5,79 | v80.25,53.15 80.27,53.13 R81.2 81.57,54.53 C144.2
  Top 0.254: 66.98,53.15 R62.1
  Route3 0.203: v68.72,53.15 68.72,78.85 68.88,79 v69.5,79
  Bottom 0.203: v68.72,53.15 v80.25,53.15
ADC0_EZ  (via drill 0.23 pad 0.53)
  Top 0.203: R60.2 C141.1 69.6,83.9 v69.61,83.8 | v69.4,92.75 IC16.41
  Route3 0.203: v69.61,83.8 69.61,92.54 v69.4,92.75
ADC0_IN  (via drill 0.23 pad 0.53)
  Top 0.203: X1.P7 102.36,50.88 v102,51.25 | v90.75,51.25 R83.2
  Bottom 0.203: v102,51.25 v90.75,51.25
ADC1  (via drill 0.23 pad 0.53)
  Top 0.203: v65.5,49.75 65.71,49.54 R19.1 v66.95,40.5 | R71.1 65.43,79.93 v65.25,79.75 | 76.39,40.86 C145.2 | 76.39,40.86 76.5,40.75 | 76.39,40.25 v75.5,40.25 | R82.2 76.39,40.25 | 76.39,40.25 76.39,40.86
  Route3 0.203: v65.5,49.75 65.25,50 v65.25,79.75
  Bottom 0.203: v75.5,40.25 67.2,40.25 v66.95,40.5
ADC1_EZ  (via drill 0.23 pad 0.53)
  Top 0.203: R71.2 C142.1 66.35,84.51 66.59,84.75 v70.75,84.75 | IC16.42 70.75,93.25 v71,93
  Route3 0.203: v71,93 71,85 v70.75,84.75
ADC1_IN  (via drill 0.23 pad 0.53)
  Top 0.203: X1.P6 105.86,37.23 v105.55,37.54 | v85.44,37.53 R85.2
  Bottom 0.203: v105.55,37.54 85.69,37.54 v85.44,37.53
ALE  (via drill 0.23 pad 0.53)
  Top 0.203: IC16.11 56.5,79.38 56.25,79.12 11.75,79.12 v11.5,79.38 | v11.75,87.25 IC13.P17
  Route3 0.203: v11.5,79.38 11.5,87 v11.75,87.25
AUDIO  (via drill 0.23 pad 0.53)
  Top 0.203: IC16.86 v47.25,92.25
  Top 0.254: R76.2 v20.53,98.25
  Route3 0.254: v20.53,98.25 v20.53,92.47
  Bottom 0.254: v47.25,92.25 20.75,92.25 v20.53,92.47
BUSY  (via drill 0.23 pad 0.53)
  Top 0.203: IC13.P7 15,92.25 v14.75,92.5 14.25,93 R80.1 | IC16.16 59,84.5 v58.75,84.75
  Route3 0.203: v14.75,92.5 14.75,96.75 v15,97 | v57.5,97 57.5,84.88 57.62,84.75 v58.75,84.75
  Bottom 0.203: v57.5,97 v15,97
CE  (via drill 0.23 pad 0.53)
  Top 0.203: IC13.P9 14.5,91.25 v14.25,91 | IC16.79 48.25,95.75 48,96 48,97.25 v47.75,97.5
  Route3 0.203: v14.25,91 14.25,97.25 v14.5,97.5
  Bottom 0.203: v47.75,97.5 v14.5,97.5
CLE  (via drill 0.23 pad 0.53)
  Top 0.203: IC13.P16 10.75,87.75 v10.5,88 | IC16.80 47.5,95.25 47.25,95.5 v47.25,96.5
  Route3 0.203: v10.5,88 10.5,96.25 v10.75,96.5
  Bottom 0.203: v47.25,96.5 v10.75,96.5
CLK_IN  (via drill 0.23 pad 0.53)
  Top 0.203: CLKIN.4 14.16,40.52 v14.85,41.2 | IC22.2 v74.79,41.41
  Bottom 0.203: v14.85,41.2 74.59,41.2 v74.79,41.41
CLK_SYNC  (via drill 0.23 pad 0.53, 0.23 pad 0.6)
  Top 0.203: IC22.4 75.74,59.13 v74.98,59.9 | v61.5,60 59.73,60 IC25.12
  Top 0.254: IC25.12
  Bottom 0.203: v74.98,59.9 61.6,59.9 v61.5,60
CTS  (via drill 0.23 pad 0.6)
  Top 0.203: IC25.29 42.18,53.68 v41.75,53.25 | v41.3,50.58 38.32,50.58
  Top 0.254: 38.32,50.58 IC21.11
  Bottom 0.203: v41.75,53.25 41.75,51.03 v41.3,50.58
D5V  (via drill 0.23 pad 0.53)
  Top 0.203: IC18.3 35.98,102.48 v36,102.5 | v36,99 36,99.76 IC18.1 | R74.2 41.85,98.52 v41.83,98.62
  Top 0.406: IC14.P$2 38.48,101.78 C85.1 37.98,101.69 37.98,99.98 C87.1 38.18,99.78 IC18.1
  Bottom 0.203: v36,102.5 v36,99 36.5,98.5 41.7,98.5 v41.83,98.62
D5V0  (via drill 0.35 pad 0.6, 0.35 pad 0.65)
  Top 0.61: v66.92,118.5 67.5,118.5 | 67.5,118.5 v68,118.5 | L7.1 67.41,118.59 67.5,118.5
  other vias: 63.42,133.25 63.42,131.5 63.42,129.65
  pour Top (no thermals): 65,136.75 65,129.25 63,129.25 63,136.75
  pour Route3 (rank 2): 78,138 78,114.5 58,114.5 58,138
D+  (via drill 0.23 pad 0.53)
  Top 0.203: IC16.55 v61.5,101.25 | v14.5,103.12 11.46,103.12
  Top 0.254: 11.46,103.12 IC15.P$4
  Route3 0.203: v61.5,101.25 v61.5,106.12
  Bottom 0.203: v14.5,103.12 30.5,103.12 30.62,103.25 30.62,105.88 30.88,106.12 v61.5,106.12
D-  (via drill 0.23 pad 0.53)
  Top 0.203: IC15.P$6 10.15,105.01 9.9,104.76 9.9,102.61 v10.18,102.33 | IC16.54 62,102.12 v62.75,102.88
  Route3 0.203: v62.75,102.88 62.75,105.4 62.65,105.5 v62.6,105.5
  Bottom 0.203: v62.6,105.5 31.5,105.5 31.25,105.25 31.25,102.75 31,102.5 10.35,102.5 v10.18,102.33
DAC_!RST  (via drill 0.23 pad 0.53)
  Top 0.203: IC6.P23 59.98,113.47 v59.98,113.25 | IC16.65 v56.5,101.25 | R20.1 v65.75,113.25
  Route3 0.203: v59.98,113.25 56.75,113.25 56.5,113 v56.5,101.25
  Bottom 0.203: v65.75,113.25 v59.98,113.25
EN_DCDC  (via drill 0.23 pad 0.53)
  Top 0.203: IC2.11 28.83,130.92 29.25,130.5 v29.25,124.48 28.83,124.06 27.8,124.06 27.52,124.34 IC2.9 | IC25.24 v43.37,57.68 | v43.12,70 31,70 v30.75,70.25 | R9.1 v43.39,65.11 v43.38,65.12
  Route3 0.203: v29.25,110.62 29.25,124.5 29.27,124.48 v29.25,124.48 | v30.75,91.25 v30.75,70.25 | 43.38,64.62 43.38,57.91 v43.37,57.68 | v19.25,110.25 19.25,91.75 v19.38,91.5 | v43.12,70 43.38,69.75 v43.38,65.12 43.38,64.62 | 43.38,64.62 43.39,64.62
  Bottom 0.203: v29.25,110.62 29,110.38 19.38,110.38 v19.25,110.25 | v19.38,91.5 30.5,91.5 v30.75,91.25
EN_IN0  (via drill 0.23 pad 0.53)
  Top 0.203: IC26.6 35.24,38.37 v35.88,37.73 | v48.22,37.33 48.22,33.26 48.66,32.82 53.66,32.82
  Top 0.305: 53.66,32.82 IC24.1
  Bottom 0.203: v35.88,37.73 47.82,37.73 v48.22,37.33
EN_N12V  (via drill 0.23 pad 0.53)
  Top 0.203: IC16.77 48.62,96.75 48.5,96.88 48.5,97.62 48.12,98 v45.38,98 | v59.4,151.62 59.4,153.44 R88.1
  Route3 0.203: v44.12,151.62 44.12,98.25 44.38,98 v45.38,98
  Bottom 0.203: v44.12,151.62 v59.4,151.62
EN_P12V  (via drill 0.23 pad 0.53)
  Top 0.203: v45.88,98.62 49.12,98.62 49.5,98.25 IC16.76 | R87.1 v60.25,145.75
  Route3 0.203: v44.62,145.62 44.62,98.88 44.88,98.62 v45.88,98.62
  Bottom 0.203: v60.25,145.75 44.75,145.75 v44.62,145.62
FILTB
  Top 0.305: IC6.P16 55.42,112.24 C32.1
  Top 0.61: C32.1 55.23,110.15 C28.+
FT_CTS  (via drill 0.23 pad 0.53)
  Top 0.203: IC21.6 31.66,50.59 v31.5,50.75 | v31.08,54.9 26.11,54.9
  Top 0.254: 26.11,54.9 IC19.11
  Top 0.305: 26.09,54.88 IC19.11
  Bottom 0.203: v31.5,50.75 31.5,54.48 v31.08,54.9
FT_RTS  (via drill 0.23 pad 0.53)
  Top 0.203: IC21.4 28.38,53.13 v28,52.75 | v27.73,49.66 IC19.3
  Top 0.254: IC19.3
  Top 0.305: IC19.3
  Bottom 0.203: v28,52.75 28,49.93 v27.73,49.66
FT_RXD
  Top 0.203: IC21.5 28.43,51.86 27.53,50.96 IC19.5
  Top 0.254: IC19.5
  Top 0.305: 26.12,50.93 IC19.5
  Top 0.406: 26.09,50.96 IC19.5
FT_TXD  (via drill 0.23 pad 0.53)
  Top 0.203: IC21.3 31.15,54.4 v30.75,54 | v27.91,48.34 26.1,48.34
  Top 0.254: 26.1,48.34 IC19.1
  Bottom 0.203: v30.75,54 30.75,48.85 30.25,48.34 v27.91,48.34
GND  (via drill 0.23 pad 0.53, 0.35 pad 0.65)
  Top 0.203: IC2.6 v25.56,124 | 25.25,134.68 25.21,134.68 v25.2,134.67 | C12.2 C7.2 | IC2.4 24.26,124.51 v24.52,124
  Top 0.406: IC2.15 25.56,134.37 25.25,134.68 | C16.2 69.45,155.98 69.16,155.7 | IC3.1 | IC25.8
  Top 0.508: 34.75,100.75 37.25,100.75
  Top 0.61: IC1.2 69.5,146.75 | 69.16,155.7 IC3.1 | IC4.4 55.16,138.84 55,139 50.07,139 C24.1 | IC5.4 67.16,138.84 67,139 62.03,139 C25.1
  Top 0.864: C14.2 25.25,134.68 26.72,134.68
  other vias: 40.14,59.62 42.36,58.12 33.05,38.33 108.52,37.58 78.07,34.26 55.51,52.08 53.8,56.15 55.65,58.17 53.43,51.05 65.94,56.89 57,32.79 72.54,34.28 116.88,44.57 109.72,44.64 53.9,65.1 49.81,66.09 18.95,42.19 5.16,34.54 11.29,34.57 42.71,40.44 31.29,42.16 44.83,32.97 50.42,43.13 115.58,37.52 86.09,40.59 91.74,38.7 95.38,38.65 95.01,40.49 100.16,40.07 68.16,55.06 50.5,33.79 19.25,124.5 19.25,125.5 20.25,125.5 20.25,124.5 21.25,124.5 19.25,126.5 20.25,127.5 21.25,127.5 21.25,126.5 19.25,127.5 20.25,126.5 21.25,125.5 23.75,127 23.75,128 23.75,129 24.75,129 24.75,128 24.75,127 25.75,127 26.75,127 26.75,128 25.75,128 25.75,129 26.75,129 25.96,134.67 18.25,124.5 18.25,125.5 18.25,126.5 18.25,127.5 8,128 17.25,124.5 16.25,124.5 66,150.75 77.96,148.46 65,150.75 69.29,150.93 70.12,150.93 77.96,156.46 69.32,158.93 70.17,158.93 64.88,157.69 65.88,157.69 45.13,51.97 59.36,43.21 58.64,42.34 54.53,42.17 71.97,50.74 73.75,49.21 75.75,49.21 6.72,104.01 44.85,89.11 39.83,90.47 39.83,89.03 44.66,93.74 11.15,89.75 49.68,102.28 58,78.79 70.23,87.41 70.23,90.26 70.36,95.26 57.99,102.78 64.98,119.35 67.49,129.69 67.45,131.51 55.61,129.66 55.6,131.49 52.7,117.25 50.89,118.91 50.85,123.63 65.73,117.35 46.93,110.12 46.93,108.37 6.1,102.43 6.52,117.5 53.9,113.54 67.72,107.32 65.1,107.3 72.23,124.1 75.48,124.1 72.23,120.6 72.23,117.1 72.23,113.6 75.48,120.6 75.48,117.1 75.48,113.6 68.98,113.6 68.98,117.1 68.98,124.1 65.48,124.1 68.98,120.6 60.35,126.22 70.48,136.1 74.23,136.1 70.48,133.1 70.48,129.85 74.23,133.1 74.23,129.85 59.23,133.35 59.23,129.85 46.48,129.6 46.48,133.1 46.48,126.1 53.86,128.16 75.36,68.12 94.86,50.62 94.86,55.62 116.36,31.62 109.86,31.62 100.36,31.62 96.36,31.62 90.86,31.62 64.86,32.62 16.43,81.16 20.43,81.16 24.43,81.16 28.43,81.16 32.93,81.16 37.43,81.16 9.93,81.16 9.93,85.53 9.93,89.28 9.93,93.03 12.43,95.78 36.93,94.16 36.93,95.53 77.43,78.03 66.43,98.53 66.43,100.28 70.43,100.28 68.43,101.03 68.43,96.53 71.43,100.28 50.24,75.21 29.24,76.46 39.8,48.04 36.93,44.44 7,129.25 7,128 7,126.75 35.12,82.3 75.28,84.01 66.92,52.02 67.62,48.34 104.11,31.62 68.64,83.37 68.64,84.12 45.48,140.35 45.48,139.1 56.73,139.1 57.98,139.1 51.73,150.1 55.23,150.1 42.98,146.1 40.23,146.1 40.23,149.85 42.98,149.85 45.73,149.85 40.23,142.35 42.98,142.35 45.73,142.35 40.23,138.35 42.98,138.35 40.23,134.35 42.98,134.35 40.23,130.35 42.98,130.35 40.23,126.35 42.98,126.35 40.23,122.35 42.98,122.35 40.62,118.52 59.73,150.1 35.23,149.85 32.23,149.85 32.23,146.85 29.23,146.85 26.23,146.85 49.16,109.35 4.43,70.03 4.43,72.03 4.43,74.03 4.43,76.03 21.93,73.04 25.49,76.71 25.49,75.71 24.39,70.12 24.4,73.07 15.68,74.28 15.68,73.03 15.68,71.78 17.18,71.78 17.18,73.03 17.18,74.28 15.68,75.53 17.18,75.53 14.18,75.53 12.68,75.53 11.18,75.53 17.18,76.78 15.68,76.78 14.18,76.78 12.68,76.78 11.18,76.78 11.18,74.28 11.18,73.03 9.68,73.03 9.68,74.28 9.68,75.53 9.68,76.78 14.18,69.78 12.68,69.78 9.68,69.53 39.89,116.83 12.68,74.28 14.18,74.28 14.18,73.03 12.68,73.03 12.68,71.78 14.18,71.78 29.18,101.48 38.47,110.43 38.47,111.93 39.72,111.93 39.72,110.43 40.97,110.43 40.97,111.93 42.22,110.43 42.22,111.93 40.97,108.93 42.22,108.93 42.22,107.43 39.72,108.93 38.47,108.93 38.47,107.43 39.72,107.43 40.97,107.43 43.47,111.93 43.47,110.43 43.47,108.93 43.47,107.43 43.47,113.43 42.22,113.43 40.97,113.43 39.72,113.43 38.47,113.43 38.47,114.93 39.72,114.93 40.97,114.93 42.22,114.93 43.47,114.93 52.91,103.22 51.52,104.93 27.68,103.98 23.18,103.98 18.68,103.98 20.93,101.73 16.18,101.73 25.68,101.73 41.92,66.51 77.43,76.41 58.6,126.22 58.6,124.22 60.35,124.22 75.98,103.02 36.47,111.93 36.47,110.43 36.47,113.43 36.47,114.93 44.71,45.92 34.87,70.83 35.34,74 42.49,73.96 42.91,76.43 67.73,142.97 66.97,105.57 50.43,99.28 66.8,94.41 57.26,100.65 51.1,89.24 56.85,84.86 63.86,87.41 66.82,89.85 62.49,97.66 46.68,104.16 66.85,110.72 62.48,107.6 70.17,159.68 69.32,159.68 70.12,151.68 69.29,151.68 32.68,103.98 60.62,48.34 58.16,107.78 59.74,101.08 83.98,51.27 87.35,57.3 81.57,57.22 82.09,43.8 76.43,43.43 78.96,37.58
  pour Top (rank 2): 148.5,15.5 148.5,61.5 78,61.5 78,77 3.5,77 3.5,69 35.75,69 35.75,43.5 0,43.5 0,36 3.5,36 3.5,15.5 87,15.5 87,12 128,12 128,15.5
  pour Top (no thermals): 21.75,130 21.75,126.5 22.45,126.5 22.45,124 15.25,124 15.25,126 5,126 5,130
  pour Bottom: 5,113.5 35,113.5 35,143.5 5,143.5
  pour Top (rank 2): 5,113.5 35,113.5 35,143.5 13.75,143.5 13.75,136.5 27.75,136.5 27.75,115.25 5,115.25
  pour Top (rank 2): 3.5,160.5 68.5,160.5 68.5,138.5 44.75,138.5 44.75,112.75 3.5,112.75 3.5,146 0,146 0,157 3.5,157
  pour Top: 69,151.75 80,151.75 80,143.25 69,143.25
  pour Top: 69,160.5 80,160.5 80,151.75 69,151.75
  pour Top: 36,111.5 36,124.25 44.75,124.25 44.75,111.5
  pour Top (rank 2): 78,138 78,107 45.25,107 45.25,138